# Altium PCB 400236.PcbDoc (part 1 of 7)
Units mm, origin at the board's own origin, x right, y up, seen from the top; angles counter-clockwise.
Board outline 136.53 x 63.5 mm, 4 copper layers (Top Layer, Mid-Layer 1, Mid-Layer 2, Bottom Layer), stack 1.49 mm thick; 344 components, 236 nets, 1364 pads, 1393 vias.
Unrouted connection lines stored in the file: 6.
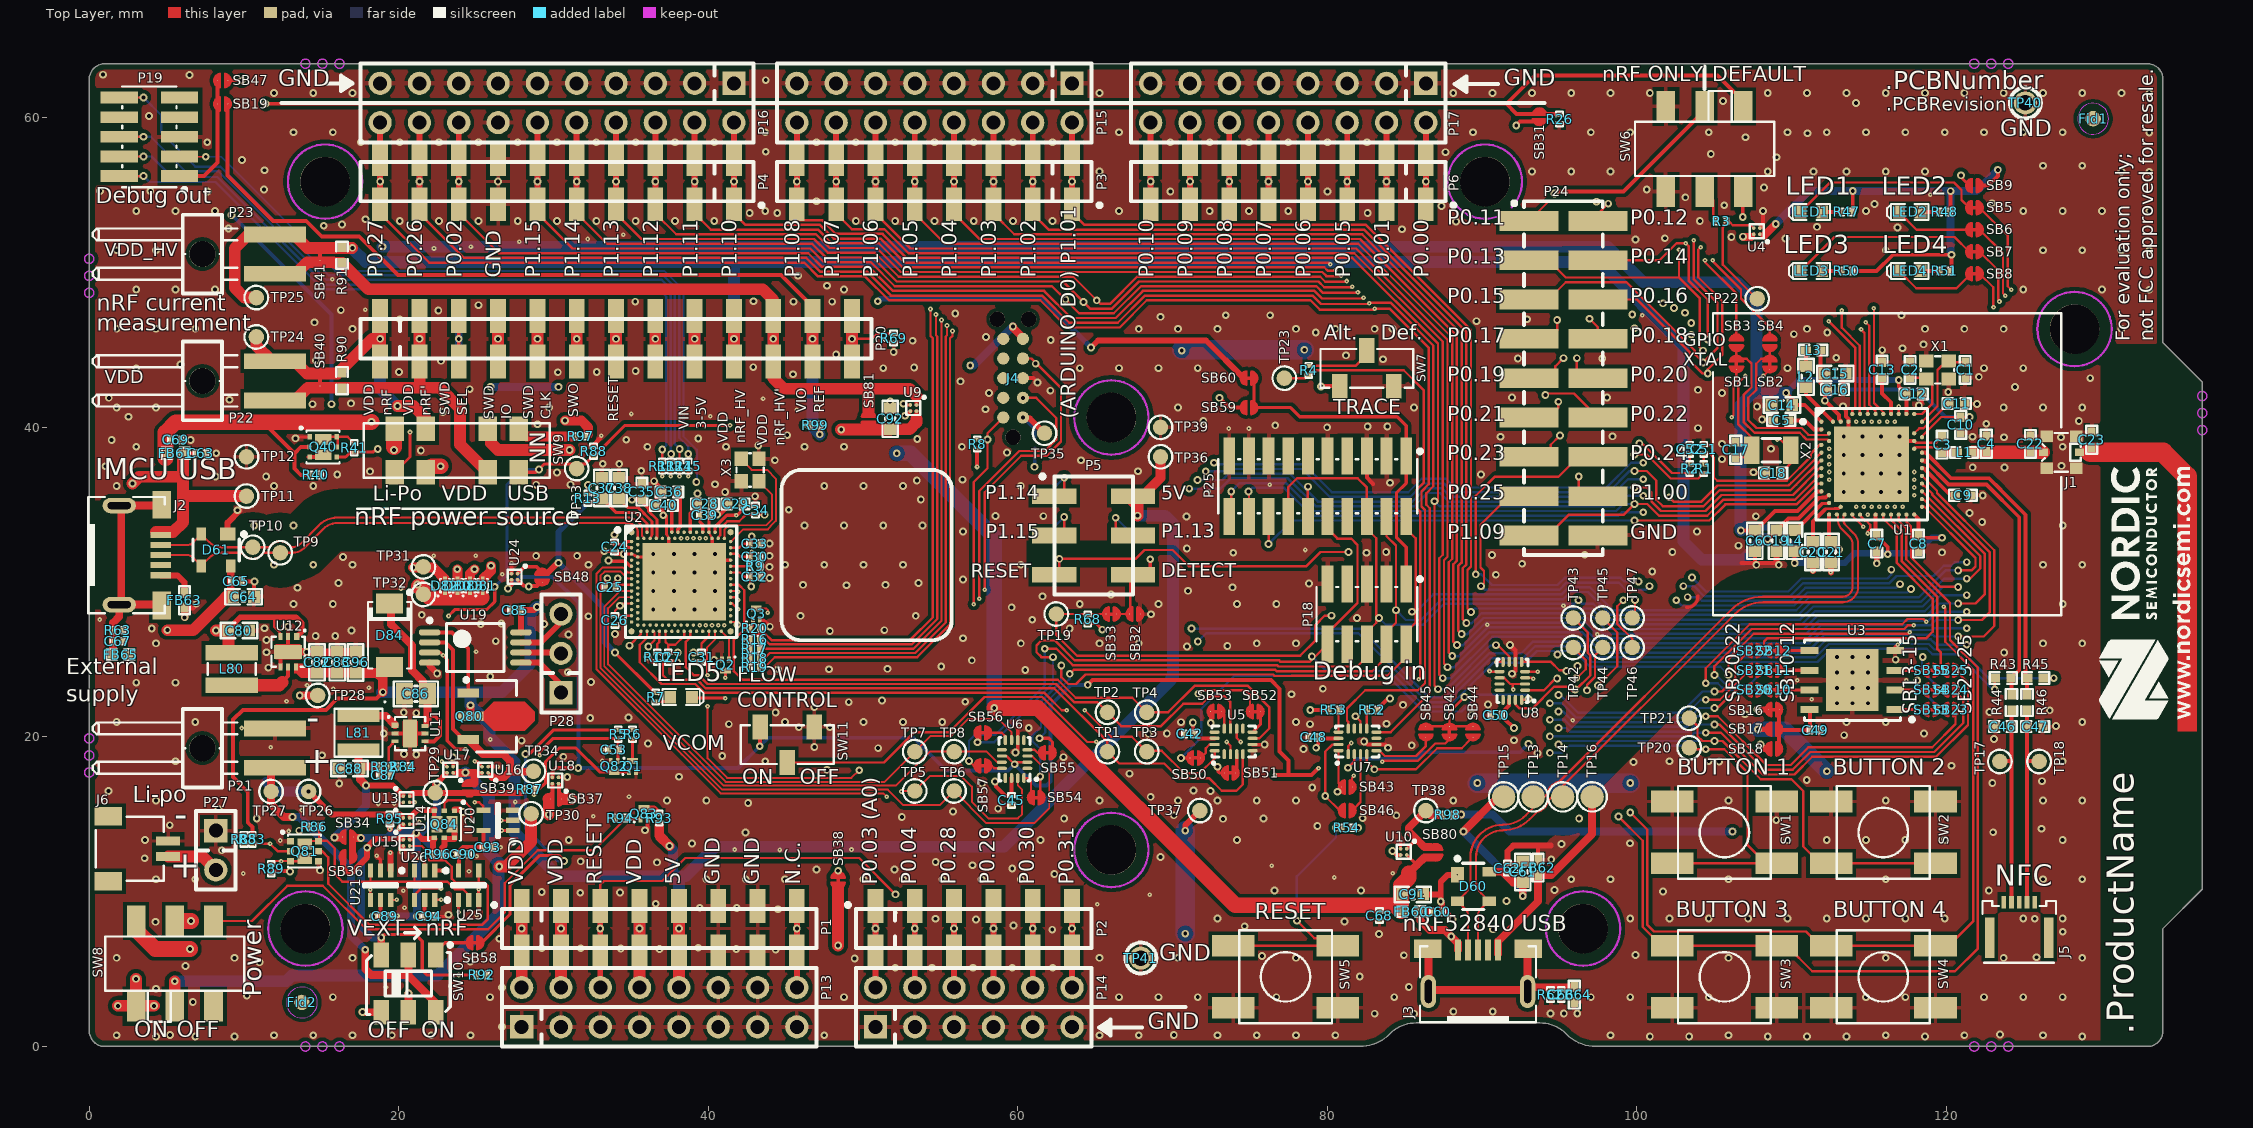
[diagram p0: Top Layer view]
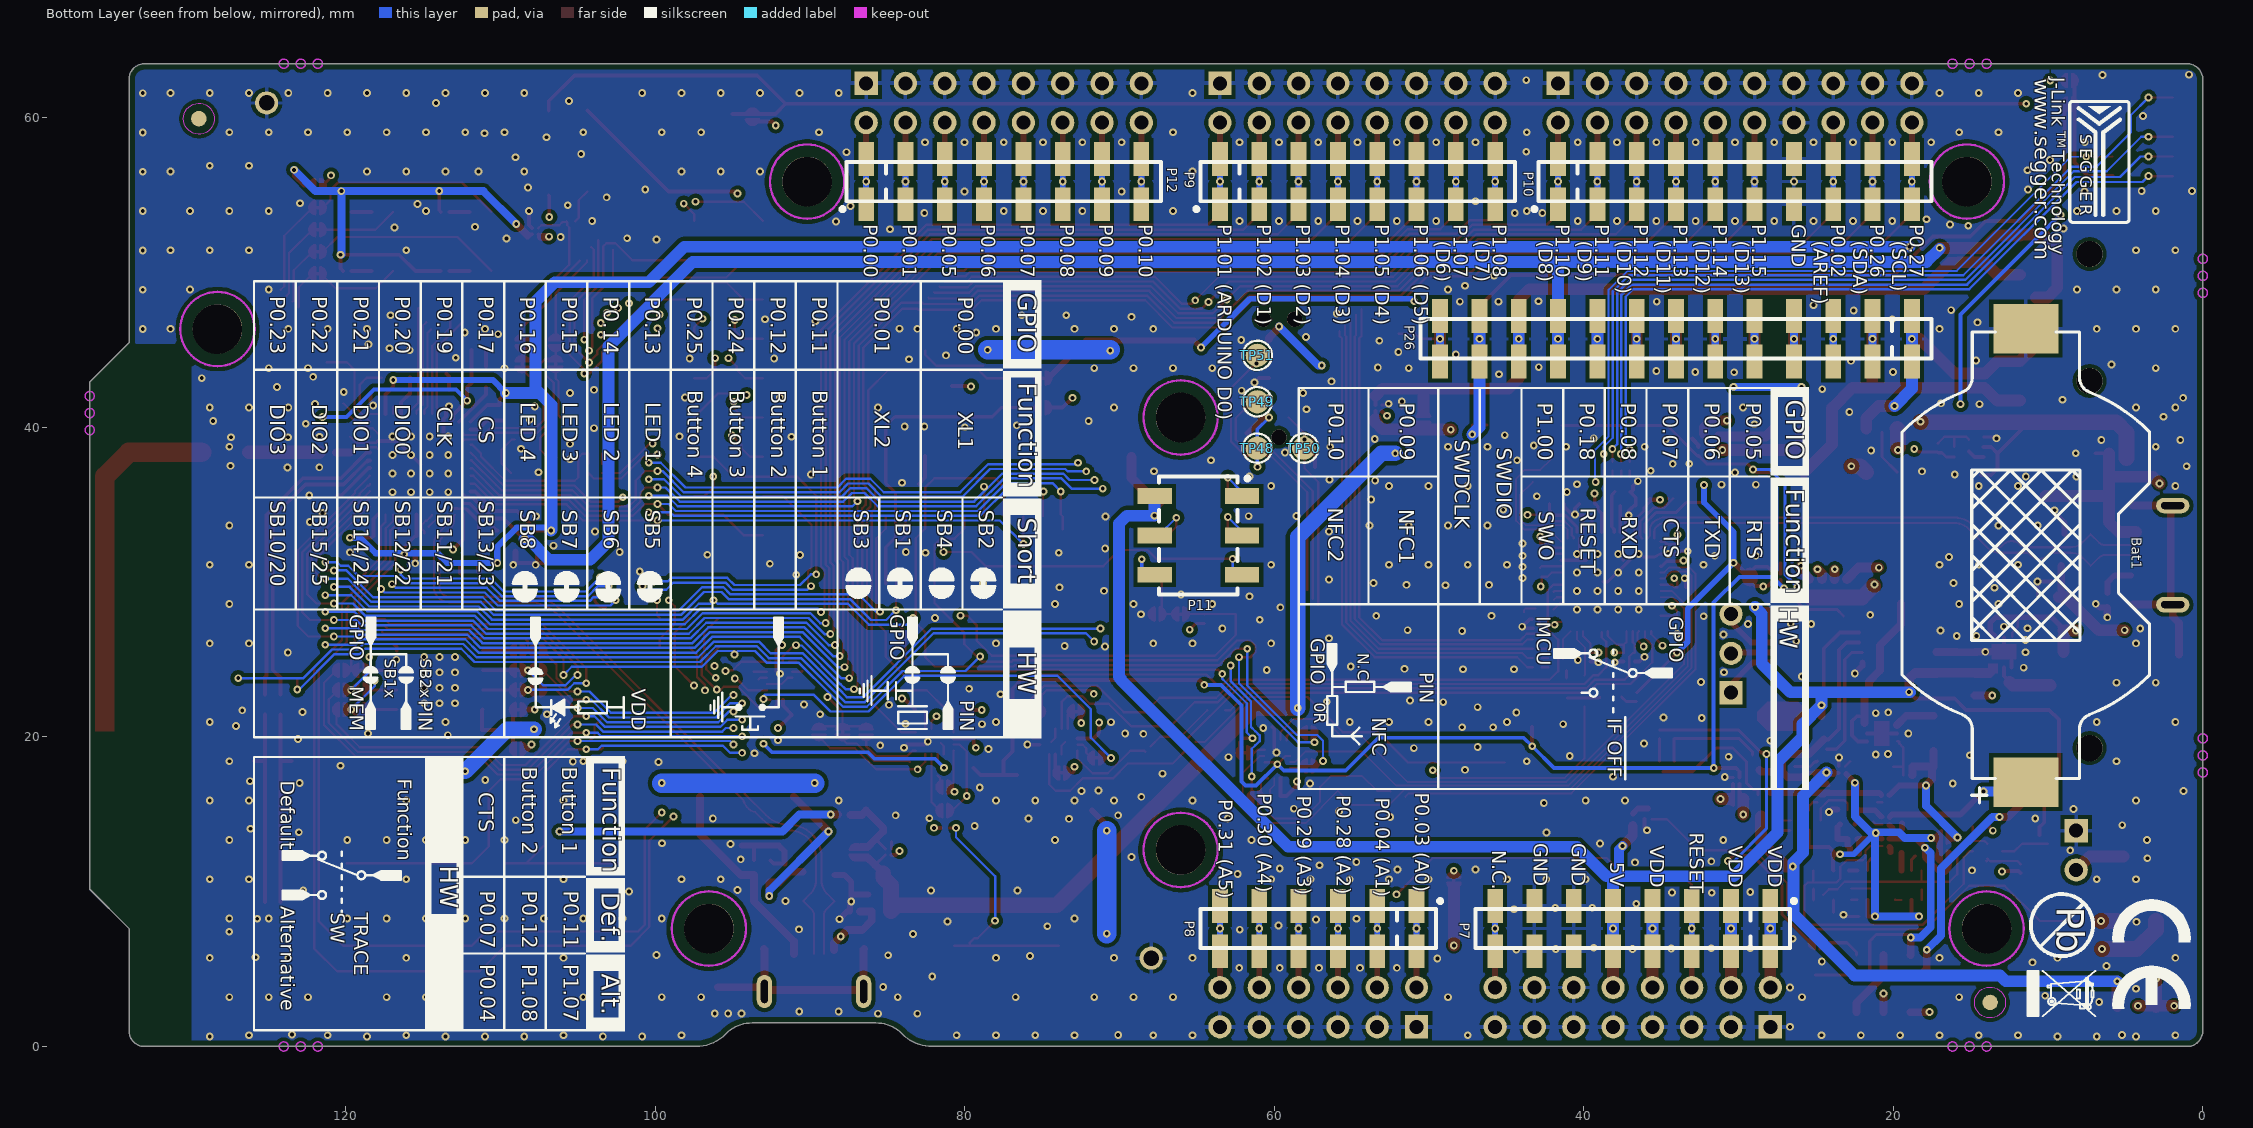
[diagram p1: Bottom Layer view, seen from below]
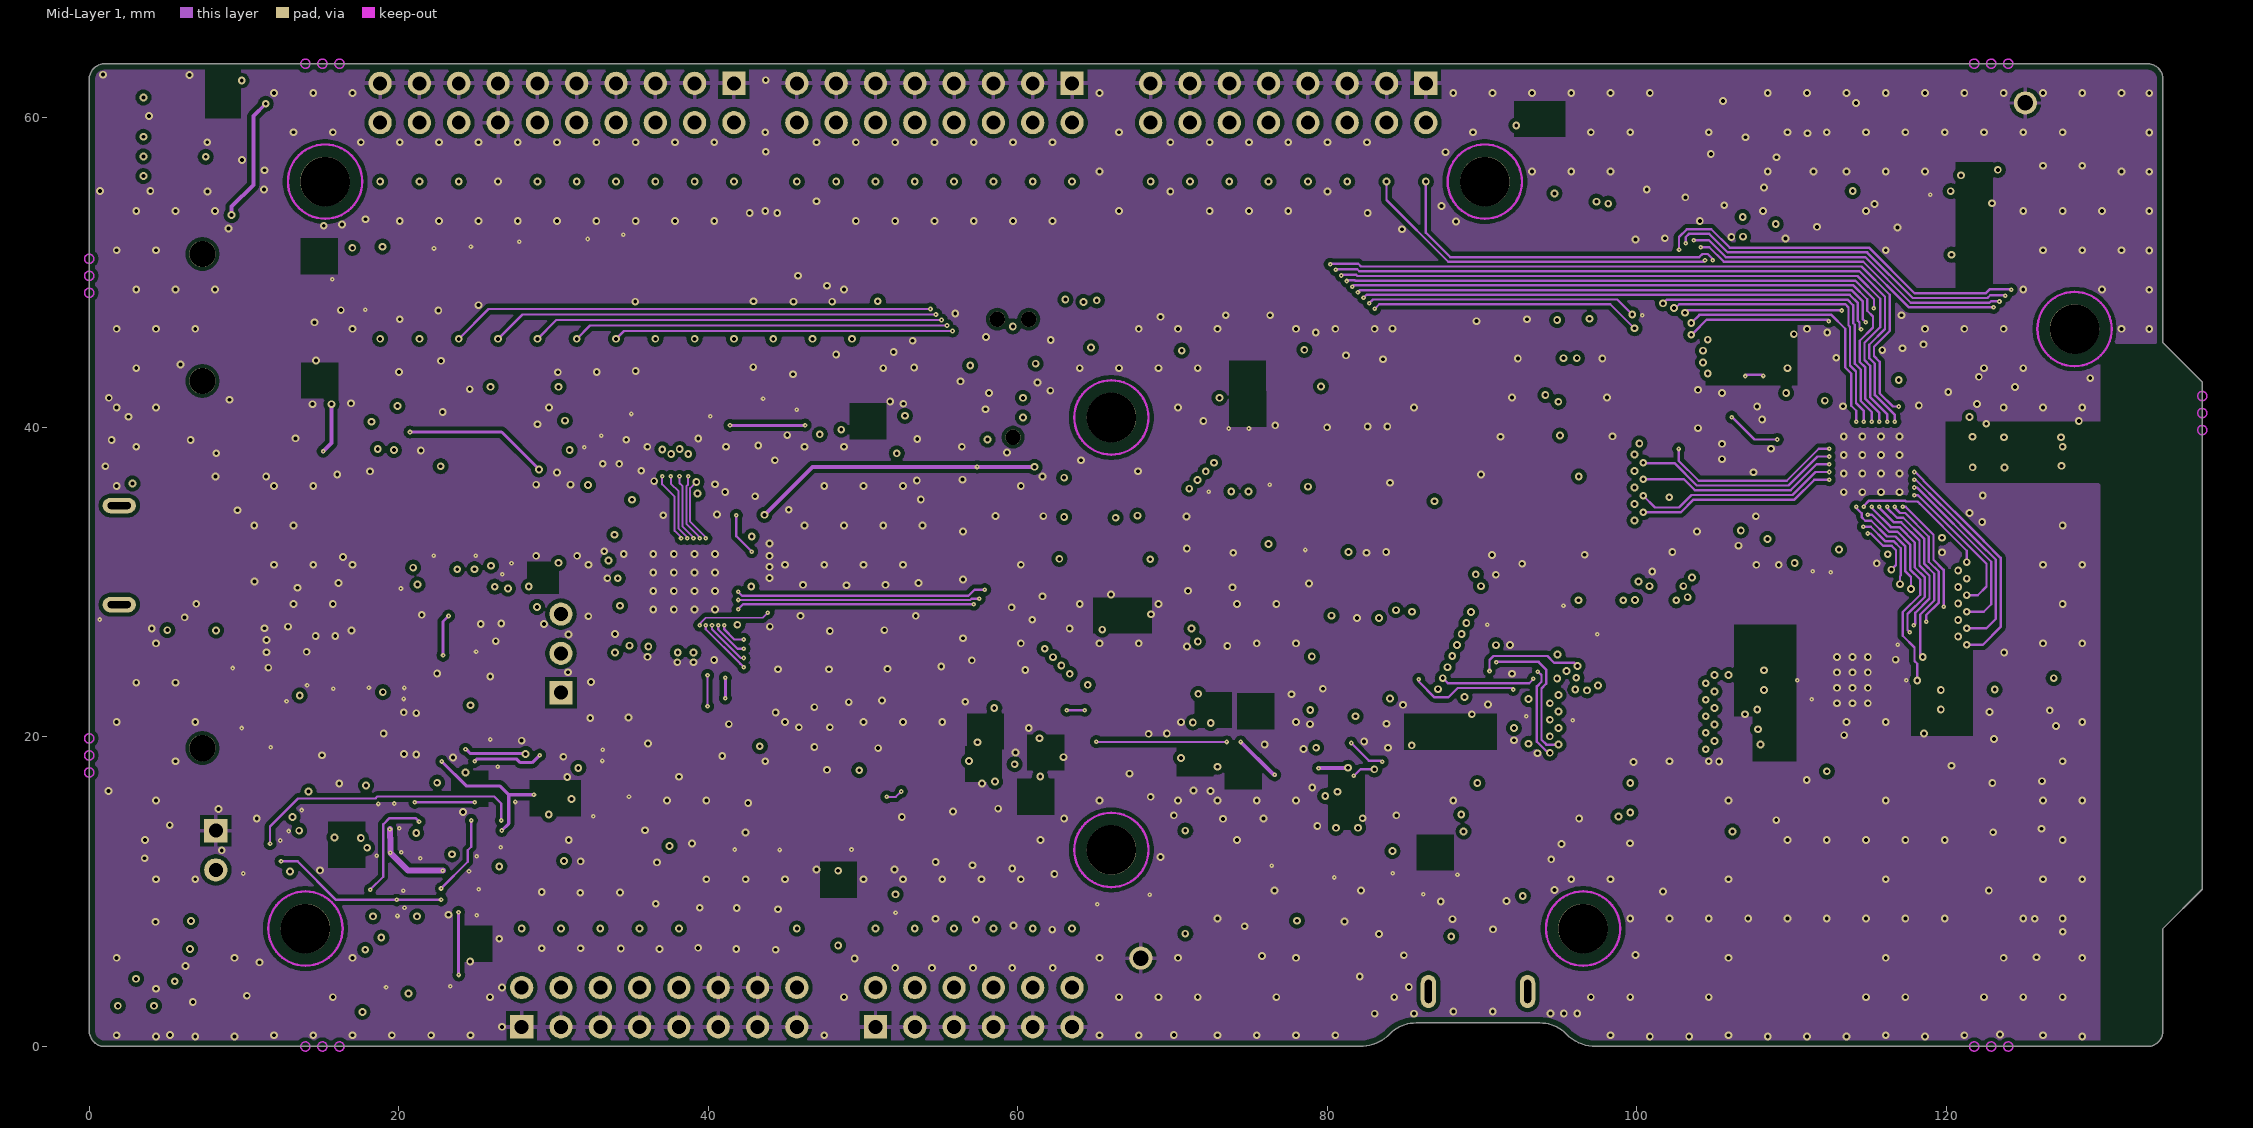
[diagram p2: Mid-Layer 1]
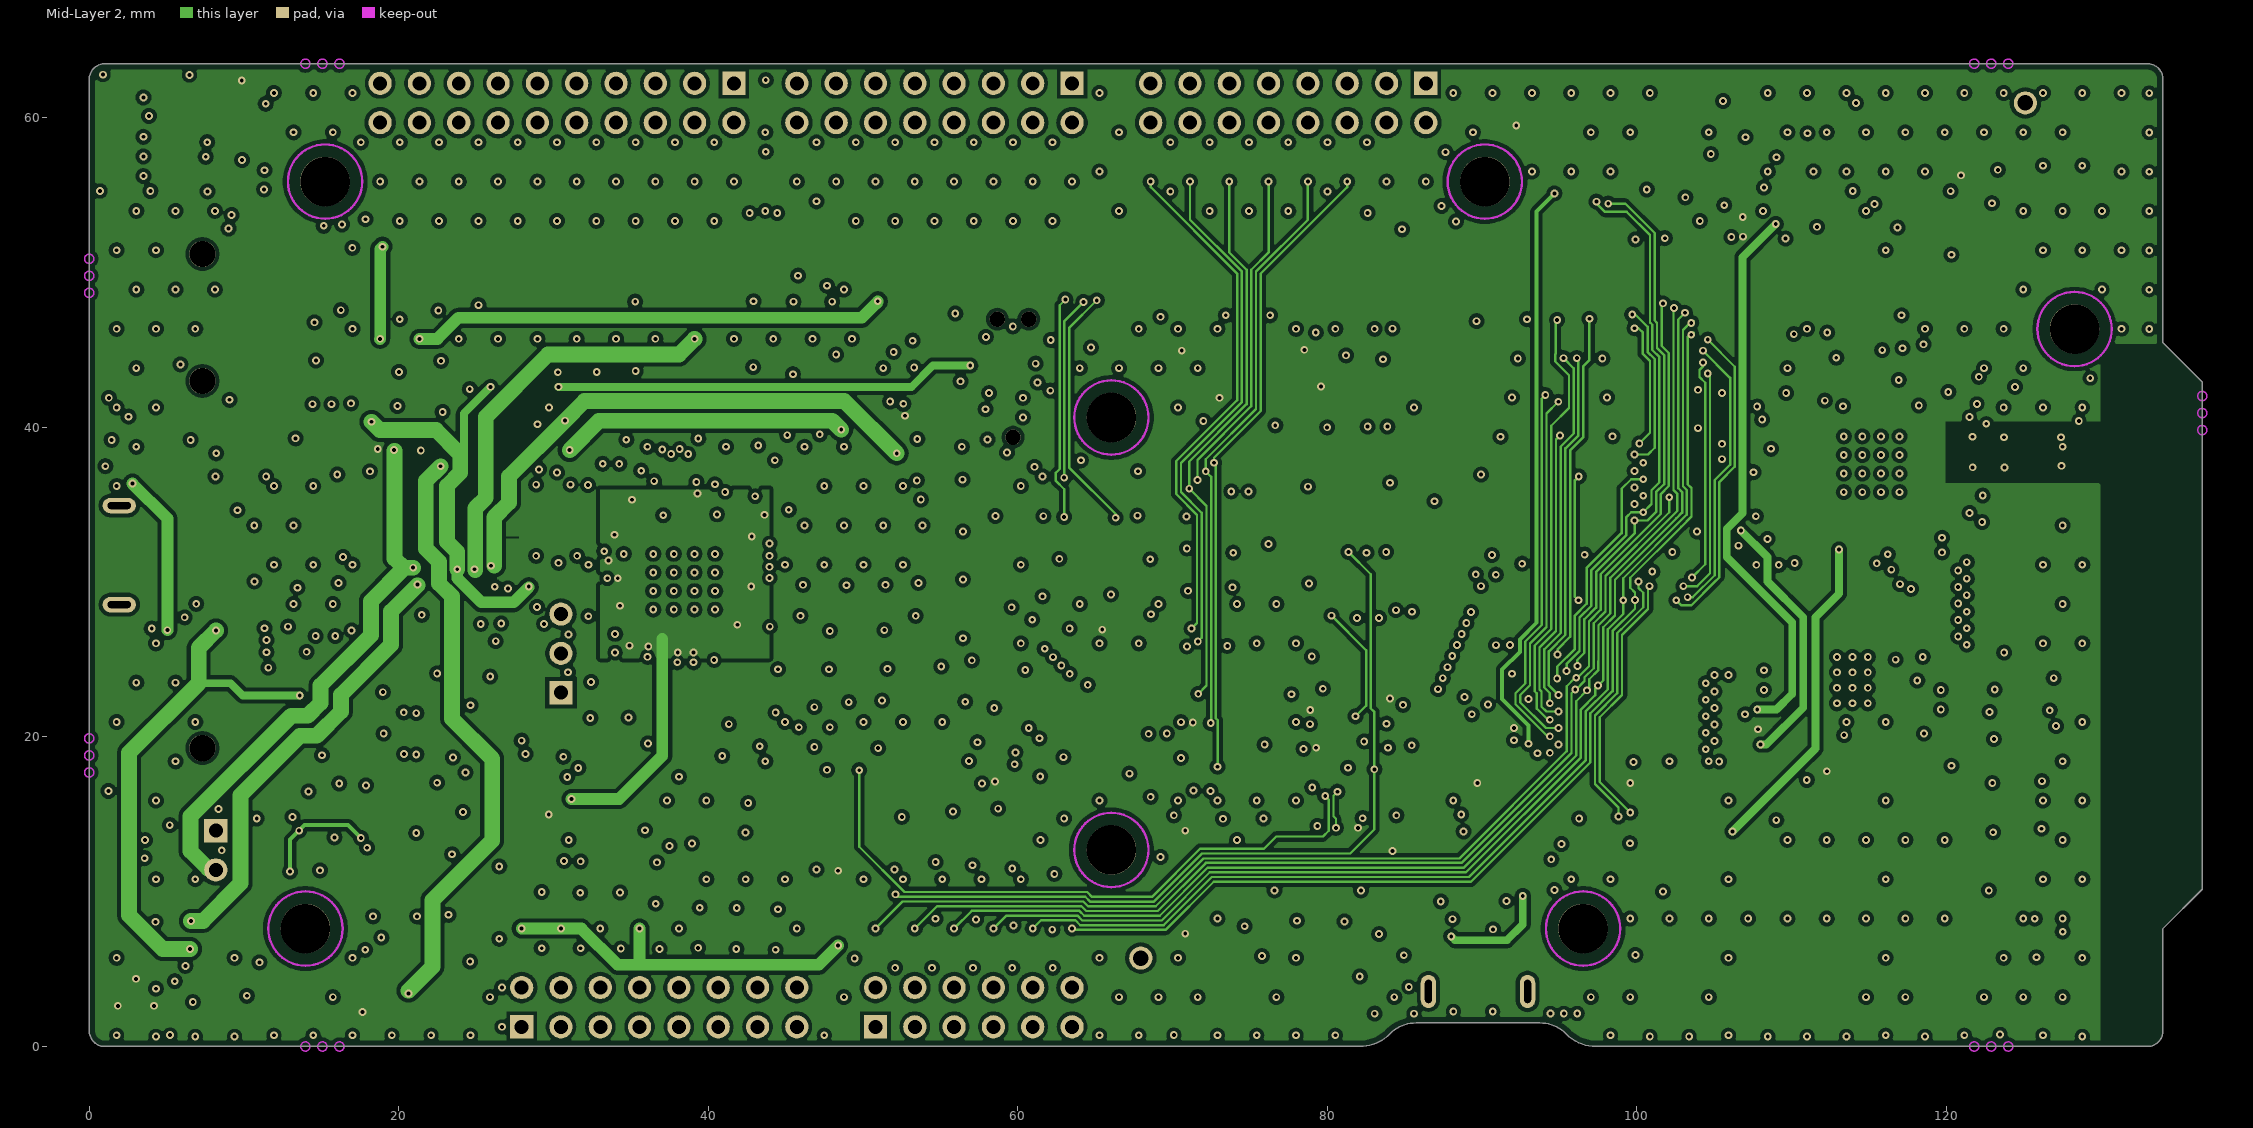
[diagram p3: Mid-Layer 2]
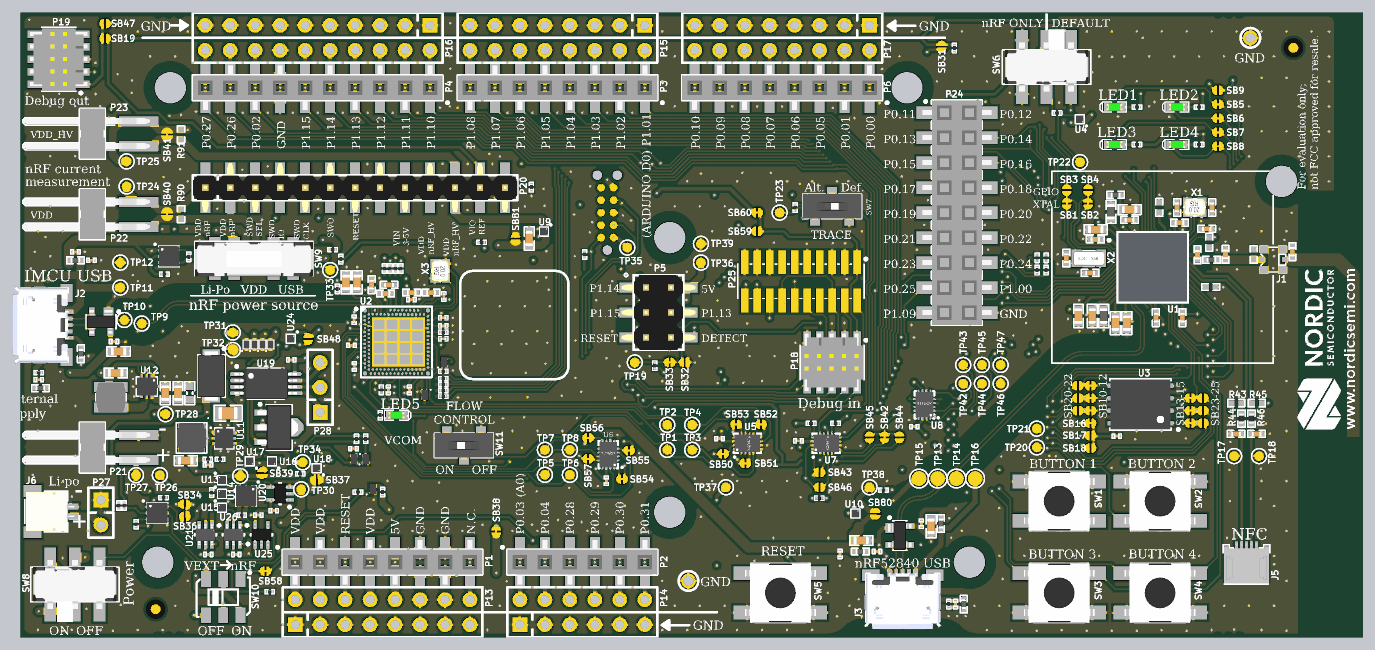
[diagram p8: 3D render of the assembled board from above, using the file's embedded part models]

## Layer stack, top to bottom
Top Solder: solder mask 0.025, Solder Resist, Dk 3.5
Top Layer: signal copper 0.035
Dielectric1: prepreg 0.075, FR-4, Dk 3.72
Mid-Layer 1: signal copper 0.035
Dielectric2: core 1.2, FR-4, Dk 3.72
Mid-Layer 2: signal copper 0.035
Dielectric3: prepreg 0.075, FR-4, Dk 3.72
Bottom Layer: signal copper 0.035
Bottom Solder: solder mask 0.025, Solder Resist, Dk 3.5

## Board outline
1.016,0 82.099,0 ccw(c82.099,2.717) 84.02,0.796 84.187,0.962 cw(c85.729,-0.876) 85.729,1.524 93.729,1.524 cw(c93.729,-0.876) 95.272,0.962 95.439,0.796 ccw(c97.36,2.717) 97.36,0 132.969,0 ccw(c132.969,1.016) 133.985,1.016 133.985,7.62 136.525,10.16 136.525,42.926 133.985,45.466 133.985,62.484 ccw(c132.969,62.484) 132.969,63.5 1.016,63.5 ccw(c1.016,62.484) 0,62.484 0,1.016 ccw(c1.016,1.016)

## Design rules (kind name [scope] priority, off if disabled: settings)
BoardOutlineClearance [All] p1: gap=0.381 ignorepadtopadclearanceinfootprint=FALSE
Clearance Microvia_Clearance [AsMM(ViaDiameter) = 0.3 vs AsMM(ViaDiameter) = 0.3] p1: gap=0.1 ignorepadtopadclearanceinfootprint=FALSE
Clearance USB_Poly_Clearance [InNamedPolygon('Top_Layer-GND') vs InDifferentialPair('D') or InDifferentialPair('IMCU')] p2: gap=1.778 ignorepadtopadclearanceinfootprint=FALSE
Clearance "NPTH clearance" [Not PadIsPlated And HoleSize > 0] p3: gap=0.229 ignorepadtopadclearanceinfootprint=FALSE except(0: Arc-Hole Track-Hole SMDPad-Hole THPad-Hole Via-Hole Fill-Hole Poly-Hole Region-Hole Text-Hole)
Clearance USB_Clearance [(InDifferentialPairClass('All Differential Pairs'))] p4: gap=0.125 ignorepadtopadclearanceinfootprint=FALSE
Clearance ANT_Clerance [InNet('ANT') or InNet('RF')] p5: gap=0.199 ignorepadtopadclearanceinfootprint=FALSE
Clearance Polygon_Clearance [(InNamedPolygon('Top_Layer-GND')) or (InNamedPolygon('Mid_Layer_1-GND')) or (InNamedPolygon('Mid_Layer_2-VDD')) or (InNamedPolygon('Mid_Layer_2-VDD_IMCU')) or (InNamedPolygon('Bottom_Layer-GND'))] p6: gap=0.254 ignorepadtopadclearanceinfootprint=FALSE except(0: Arc-Hole Track-Hole SMDPad-Hole THPad-Hole Via-Hole Fill-Hole Poly-Hole Region-Hole Text-Hole)
Clearance SB_Clearance [HasFootprint('Solderbridge') or HasFootprint('QFN40P180X140X55-10N')] p7: gap=0.127 ignorepadtopadclearanceinfootprint=FALSE except(0: Arc-Hole Track-Hole SMDPad-Hole THPad-Hole Via-Hole Fill-Hole Poly-Hole Region-Hole Text-Hole)
Clearance CSP_Clearance [HasFootprint('BGA4C40P2X2_76X76X62')] p8: gap=0.127 ignorepadtopadclearanceinfootprint=FALSE except(0: Arc-Hole Track-Hole SMDPad-Hole THPad-Hole Via-Hole Fill-Hole Poly-Hole Region-Hole Text-Hole)
Clearance P23_Clearance [HasFootprint('FPC_05P-0.5mm-RA-SMD')] p9: gap=0.127 ignorepadtopadclearanceinfootprint=FALSE except(0: Arc-Hole Track-Hole SMDPad-Hole THPad-Hole Via-Hole Fill-Hole Poly-Hole Region-Hole Text-Hole)
Clearance PSON35P100X50-8N_Clearance [HasFootprint('PSON35P100X50-8N')] p10: gap=0.15 ignorepadtopadclearanceinfootprint=FALSE except(0: Arc-Hole Track-Hole SMDPad-Hole THPad-Hole Via-Hole Fill-Hole Poly-Hole Region-Hole Text-Hole)
Clearance Top_layer_Clearance [All vs OnLayer('Top Layer')] p11: gap=0.125 ignorepadtopadclearanceinfootprint=FALSE
Clearance [All] p12: gap=0.125 ignorepadtopadclearanceinfootprint=FALSE
ComponentClearance [All] p1 off: gap=0.254 collisioncheckmode=3 verticalgap=0.254 showdistances=FALSE
DiffPairsRouting [All] p1: maxlimit=0.193 minlimit=0.191 mostfreqgap=0.193 toplayer_minwidth=0.15 toplayer_maxwidth=0.165 toplayer_prefwidth=0.165 midlayer1_minwidth=0.15 midlayer1_maxwidth=0.165 midlayer1_prefwidth=0.165 midlayer2_minwidth=0.15 midlayer2_maxwidth=0.165 midlayer2_prefwidth=0.165 bottomlayer_minwidth=0.15 bottomlayer_maxwidth=0.165 bottomlayer_prefwidth=0.165 maxuncoupledlength=12.7
FabricationTestPointUsage TestPointUsage [All] p1: valid=0 allowmultiple=FALSE
FabricationTestpoint Testpoint [All] p1: side=3 testpointundercomponent=TRUE minsize=1.016 maxsize=2.54 preferedsize=1.524 minholesize=0 maxholesize=1.016 preferedholesize=0.813 testpointgrid=0.025 allowsidetop=TRUE allowsidebottom=TRUE usegrid=TRUE gridtolerance=0
Height [All] p1 off: minheight=0 maxheight=25.4 prefheight=12.7
HoleSize [All] p1: absolutevalues=TRUE maxlimit=5 minlimit=0.1 maxpercent=80.000 minpercent=20.000
MinimumAnnularRing [All] p1 off: minimumring=0.152
NetAntennae NetAntennae_ANT [InNet('ANT')] p1: netantennaetolerance=40
NetAntennae [All] p2 off: netantennaetolerance=0
PolygonConnect PolygonConnect_1 [isVia and innet(gnd) or isVia and innet('VDD') or HasFootprint('COAXIAL-SWF') or isVia and innet('VDD_IMCU')] p1: connectstyle=Direct reliefconductorwidth=0.254 reliefentries=4 polygonreliefangle="90 Angle" airgapwidth=0.254
PolygonConnect [All] p2: connectstyle=Relief reliefconductorwidth=0.254 reliefentries=4 polygonreliefangle="90 Angle" airgapwidth=0.254
RoutingVias [All] p1: holewidth=0.25 width=0.5 viastyle="Through Hole" minholewidth=0.1 minwidth=0.3 maxholewidth=0.305 maxwidth=0.61
SilkToSolderMaskClearance SilkscreenOverComponentPads [IsPad] p1: minsilkscreentomaskgap=0.254 clearancetoexposedcopper=TRUE
SolderMaskExpansion SolderMaskExpansion_1 [isVia] p1: expansion=0.102 istentingtop=TRUE
SolderMaskExpansion [All] p2: expansion=0.076 istentingtop=FALSE
UnpouredPolygon [All] p1 off:
Width Width_Diff [(InDifferentialPairClass('All Differential Pairs'))] p1: maxlimit=0.165 minlimit=0.165 preferedwidth=0.165
Width [All] p2: maxlimit=10.16 minlimit=0.102 preferedwidth=0.152 minimp=50.000000 maximp=50.000000 favimp=50.000000
21 further rules are at their usual default settings.

## Classes and differential pairs
component class pca10056_sheet6_power_supply: Bat1 C53 C80 C82 C83 C85 C86 C87 C88 C89 C90 C91 C92 C93 C94 C96 D80 D81 D82 D83 D84 L80 L81 P21 P22 P23 Q1 Q80 Q81 Q82 Q83 Q84 R5 R6 R82 R83 R84 R85 R86 R87 R88 R89 R90 R91 R92 R93 R94 R95 R96 R97 R98 R99 SB34 SB36 SB37 SB38 SB39 SB40 SB41 SB48 SB58 SB80 SB81 SW8 SW9 SW10 TP24 TP25 TP26 TP27 TP28 TP29 TP30 TP32 TP33 TP34 TP35 TP36 TP37 TP38 TP39 TP40 TP41 U9 U10 U11 U12 U13 U14 U15 U16 U17 U18 U19 U20 U21 U24 U25 U26
component class pca10056_sheet5_connectors: C60 C61 C62 C63 C64 C65 C66 C67 C68 C69 D60 D61 FB60 FB61 FB62 FB63 FB64 FB65 J2 J3 J5 J6 P1 P2 P3 P4 P5 P6 P7 P8 P9 P10 P11 P12 P13 P14 P15 P16 P17 P18 P19 P20 P24 P25 P26 P27 R62 R63 R68 R69 SB19 SB32 SB33 SB47 SB59 SB60 TP9 TP10 TP11 TP12 TP13 TP14 TP15 TP16 TP17 TP18 TP19 TP31 TP42 TP43 TP44 TP45 TP46 TP47
component class pca10056_sheet4_misc: C42 C45 C46 C47 C48 C49 C50 LED1 LED2 LED3 LED4 P28 Q40 R3 R4 R26 R40 R41 R44 R46 R47 R48 R50 R51 R52 R53 R54 SB5 SB6 SB7 SB8 SB9 SB16 SB17 SB18 SB31 SB42 SB43 SB44 SB45 SB46 SB50 SB51 SB52 SB53 SB54 SB55 SB56 SB57 SW1 SW2 SW3 SW4 SW5 SW6 SW7 SW11 TP1 TP2 TP3 TP4 TP5 TP6 TP7 TP8 TP20 TP21 TP22 TP23 U3 U4 U5 U6 U7 U8
component class pca10056_sheet3_interface_mcu: C24 C25 C26 C27 C28 C29 C30 C31 C32 C33 C34 C35 C36 C37 C38 C39 C40 J4 LED5 Q2 Q3 R7 R8 R9 R10 R11 R12 R13 R14 R15 R16 R17 R18 R19 R20 TP48 TP49 TP50 TP51 U2 X3
differential pair IMCU: +IMCU_P -IMCU_N
differential pair D: +D_P -D_N

## Components (designator, comment, footprint, x,y, rotation, side; value= is the part's Value field where it differs from the comment)
Bat1 "Bat Holder CR2032" L-KLS5-CR2032-23-B1 11.43,31.735 r90 bottom locked
C1 "12pF" CAPC1005X04L 121.203,43.713 r270 top
C2 "12pF" CAPC1005X04L 117.647,43.713 r90 top
C3 "0.8pF" CAPC1005X04L 119.715,38.893 r270 top
C4 "0.5pF" CAPC1005X04L 122.57,38.938 r270 top
C5 "100nF" CAPC1005X04L 109.324,40.455 r180 top
C6 "4.7µF" CAPC1608X06L 107.613,32.667 r270 top
C7 "100nF" CAPC1005X04L 115.49,32.492 r270 top
C8 "100nF" CAPC1005X04L 118.189,32.492 r270 top
C9 "N.C." CAPC1005X04L_NC 121.064,35.617 r0 top
C10 "N.C." CAPC1005X04L_NC 120.919,40.157 r90 top
C11 "100pF" CAPC1005X04L 120.664,41.542 r0 top
C12 "100nF" CAPC1005X04L 117.889,42.167 r0 top
C13 "N.C." CAPC1005X04L_NC 115.839,43.717 r90 top
C14 "1.0µF" CAPC1608X06L 109.364,41.444 r180 top
C15 "1.0µF" CAPC1608X06L 112.814,43.481 r180 top
C16 "47nF" CAPC1005X04L 112.801,42.443 r0 top
C17 "12pF" CAPC1005X04L 106.385,38.55 r270 top
C18 "12pF" CAPC1005X04L 108.798,37.052 r0 top
C19 "4.7µF" CAPC1608X06L 109.014,32.667 r270 top
C20 "4.7µF" CAPC1608X06L 111.364,31.942 r270 top
C21 "4.7µF" CAPC1608X06L 112.539,31.942 r270 top
C22 "N.C." CAPC1005X04L_NC 125.423,38.935 r90 top
C23 "1.2pF" CAPC1005X04L 129.379,39.204 r90 top
C24 "100nF" CAPC0603X03L_C 33.939,32.277 r270 top
C25 "100nF" CAPC0603X03L_C 33.664,29.677 r180 top
C26 "100nF" CAPC0603X03L_C 33.964,27.527 r270 top
C27 "100nF" CAPC0603X03L_C 37.415,25.152 r270 top
C28 "1.0µF" CAPC1005X04L 39.789,35.052 r0 top
C29 "1.0µF" CAPC1005X04L 41.764,35.052 r0 top
C30 "2.2nF" CAPC0603X03L_C 43,31.652 r0 top
C31 "100nF" CAPC0603X03L_C 39.564,25.152 r270 top
C32 "100nF" CAPC0603X03L_C 43,30.352 r0 top
C33 "100nF" CAPC0603X03L_C 43,32.491 r0 top
C34 "100nF" CAPC0603X03L_C 43.05,34.65 r90 top
C35 "1.0µF" CAPC1005X04L 35.714,35.852 r270 top
C36 "1.0µF" CAPC1005X04L 37.489,35.832 r0 top
C37 "4.7µF" CAPC1608X06L 33.114,36.082 r90 top
C38 "4.7µF" CAPC1608X06L 34.239,36.082 r90 top
C39 "100nF" CAPC0603X03L_C 39.758,34.327 r0 top
C40 "1.0µF" CAPC1005X04L 37.139,34.957 r0 top
C42 "100nF" CAPC0603X03L_C 71.095,20.193 r0 top
C45 "100nF" CAPC0603X03L_C 59.588,15.9 r90 top
C46 "300pF" CAPC1005X04L 123.647,20.669 r180 top
C47 "300pF" CAPC1005X04L 125.73,20.669 r180 top
C48 "100nF" CAPC0603X03L_C 79.121,19.964 r0 top
C49 "100nF" CAPC0603X03L_C 111.506,20.447 r180 top
C50 "100nF" CAPC0603X03L_C 90.907,21.412 r0 top
C51 "N.C." CAPC0603X03L_C_NC 104.318,38.583 r270 top
C52 "N.C." CAPC0603X03L_C_NC 103.403,38.583 r270 top
C53 "10nF" CAPC0603X03L_C 33.875,19.175 r0 top
C60 "10nF" CAPC0603X03L_C 87.122,8.712 r180 top
C61 "10µF" CAPC1608X06L 92.623,11.278 r270 top
C62 "100nF" CAPC0603X03L_C 91.632,11.532 r270 top
C63 "10nF" CAPC0603X03L_C 7.219,38.329 r0 top
C64 "10µF" CAPC1608X06L 9.972,29.058 r180 top
C65 "100nF" CAPC0603X03L_C 9.515,30.074 r180 top
C66 "4.7nF" CAPC0603X03L_C 95.104,3.355 r90 top
C67 "4.7nF" CAPC0603X03L_C 1.85,26.187 r180 top
C68 "100nF" CAPC0603X03L_C 83.363,8.458 r90 top
C69 "100nF" CAPC0603X03L_C 5.588,39.192 r180 top
C80 "10µF" CAPC1608X06L 9.675,26.875 r180 top
C82 "10µF" CAPC1608X06L 14.725,24.825 r270 top
C83 "10µF" CAPC1608X06L 16.025,24.825 r270 top
C85 "100nF" CAPC0603X03L_C 27.534,28.194 r0 top
C86 "4.7µF" CAPC2012X11L 21.107,22.784 r0 top
C87 "150pF" CAPC0603X03L_C 19.075,17.526 r180 top
C88 "10µF" CAPC1608X06L 16.815,17.958 r0 top
C89 "100nF" CAPC0603X03L_C 19.101,8.407 r180 top
C90 "100nF" CAPC0603X03L_C 24.181,12.421 r180 top
C91 "1.0µF" CAPC1608X06L 85.522,9.83 r180 top
C92 "1.0µF" CAPC1608X06L 51.75,40.55 r270 top
C93 "100nF" CAPC0603X03L_C 25.756,12.878 r180 top
C94 "100nF" CAPC0603X03L_C 21.946,8.407 r180 top
C96 "N.C." CAPC1608X06L_NC 17.215,24.815 r270 top
D60 "PRTR5V0U2X" SOT190P230X110-4L 89.427,10.34 r0 top
D61 "PRTR5V0U2X" SOT190P230X110-4L 8.194,32.08 r270 top
D80 "NSR0620P2T5G" SODFL100X40-2N 23.8,29.766 r90 top
D81 "NSR0620P2T5G" SODFL100X40-2N 25.425,29.766 r90 top
D82 "NSR0620P2T5G" SODFL100X40-2N 22.987,29.766 r90 top
D83 "NSR0620P2T5G" SODFL100X40-2N 24.613,29.766 r90 top
D84 "LS14" SODFL500X108-2N 19.407,26.568 r270 top
FB60 "120R/0.55A" INDC1005X04L 85.42,8.712 r180 top
FB61 "120R/0.55A" INDC1005X04L 5.588,38.329 r180 top
FB62 "120R/0.55A" INDC1005X04L 93.614,11.558 r90 top
FB63 "120R/0.55A" INDC1005X04L 6.147,28.829 r270 top
FB64 "120R/0.55A" INDC1005X04L 95.942,3.355 r270 top
FB65 "120R/0.55A" INDC1005X04L 2.021,25.317 r0 top
Fid1 "Fiducial mark" Fiducial 129.471,59.944 r180 top value=N.A.
Fid2 "Fiducial mark" Fiducial 13.743,2.845 r0 top value=N.A.
J1 "MM8130-2600" COAXIAL-SWF 127.423,38.391 r90 top
J2 "MicroUSB-B" USB-Micro-B-RA-SMD-PiP_Allen 4.619,31.75 r0 top
J3 "MicroUSB-B" USB-Micro-B-RA-SMD-PiP_Allen 89.729,6.232 r90 top
J4 "TC2050-IDC" TC2050-IDC-NLFP 59.69,43.18 r90 top locked
J5 "FPC 0.5mm RA SMD" FPC_05P-0.5mm-RA-SMD 123.698,9.328 r0 top
J6 "HDR-2, 1mm" SM02B-SRSS-TB 5.105,12.776 r270 top
L1 "4.7nH" INDC1005X04L 121.138,38.385 r0 top
L2 "10µH" INDC1608X06L 110.914,43.267 r270 top
L3 "15nH" INDC1005X04L 111.389,44.992 r180 top
L4 "10µH" INDC1608X06L 110.189,32.667 r90 top
L80 "4.7µH" VLS3012HBX 9.2,24.4 r270 top
L81 "4.7µH" TY-NR3015 17.399,20.269 r270 top
LED1 "L0603G" LED_0603_G 111.273,53.917 r0 top
LED2 "L0603G" LED_0603_G 117.623,53.917 r0 top
LED3 "L0603G" LED_0603_G 111.273,50.107 r0 top
LED4 "L0603G" LED_0603_G 117.623,50.107 r0 top
LED5 "L0603G" LED_0603_G 38.239,22.575 r180 top
P1 "Socket 1x8" SOCKET_1x8_SMD 27.94,7.62 r0 top locked
P2 "Socket 1x6" SOCKET_1x6_SMD 50.8,7.62 r0 top locked
P3 "Socket 1x8" SOCKET_1x8_SMD 63.5,55.88 r180 top locked
P4 "Socket 1x10" SOCKET_1x10_SMD 41.656,55.88 r180 top locked
P5 "Pin Hdr 2x3" HDR_2x3-SMD 64.897,33.02 r270 top locked
P6 "Socket 1x8" SOCKET_1x8_SMD 86.36,55.88 r180 top locked
P7 "Pin List 1x8" LIST_1x8_SMD-NC 27.94,7.62 r0 bottom locked
P8 "Pin List 1x6" LIST_1x6_SMD-NC 50.8,7.62 r0 bottom locked
P9 "Pin List 1x8" LIST_1x8_SMD-NC 63.5,55.88 r180 bottom locked
P10 "Pin List 1x10" LIST_1x10_SMD-NC 41.656,55.88 r180 bottom locked
P11 "Socket 2x3" SOCKET_2x3_SMD-2.54mm-NC 64.897,33.02 r90 bottom
P12 "Pin List 1x8" LIST_1x8_SMD-NC 86.36,55.88 r180 bottom locked
P13 "Pin Header 2x8" HDR_2x8-NC 36.83,2.54 r0 top locked
P14 "Pin Header 2x6" HDR_2x6-NC 57.15,2.54 r0 top locked
P15 "Pin Header 2x8" HDR_2x8-NC 54.61,60.96 r180 top locked
P16 "Pin Header 2x10" HDR_2x10-NC 30.226,60.96 r180 top locked
P17 "Pin Header 2x8" HDR_2x8-NC 77.47,60.96 r180 top locked
P18 "Pin Header 2x5, 1.27mm" HDR_2x5-SMD-1.27mm-K 82.55,27.94 r180 top locked
P19 "Pin Header 2x5, 1.27mm" HDR_2x5-SMD-1.27mm-K 3.886,58.776 r90 top
P20 "Pin List 1x13" LIST_1x13_SMD 18.796,45.72 r0 top locked
P21 "Pin List 1x2, Angled" LIST_ANG_1x2-SMD-2.54MM 11.811,19.279 r270 top
P22 "Pin List 1x2, Angled" LIST_ANG_1x2-SMD-2.54MM 11.811,43 r270 top
P23 "Pin List 1x2, Angled" LIST_ANG_1x2-SMD-2.54MM 11.811,51.2 r270 top
P24 "Socket 2x9" SOCKET_2x9_SMD-2.54mm-Mirrored 95.25,43.18 r270 top locked
P25 "Pin Header 2x10, 1.27mm" HDR_2x10-SMD-1.27mm-NC 79.375,36.195 r180 top locked
P26 "Socket 1x13" LIST_1x13_SMD-NC 18.796,45.72 r0 bottom locked
P27 "Pin List 1x2" LIST_1x2-NC 8.179,12.675 r270 top locked
P28 "Pin List 1x3" LIST_1x3-NC 30.48,25.4 r90 top locked
Q1 "RV2C010UNT2L" DFN65P100X40-3L 35.1,18.1 r90 top
Q2 "RV2C010UNT2L" DFN65P100X40-3L 41.1,24.65 r270 top
Q3 "RV2C010UNT2L" DFN65P100X40-3L 43.1,27.95 r90 top
Q40 "PMCPB5530" PMCPB5530X 15.113,38.735 r0 top
Q80 "FCX690BTA" SOT89-150P409X160-3N 26.289,21.336 r0 top
Q81 "TSM250N02DCQ RFG" DFN65P200X200X80_HS-6N 13.919,12.624 r0 top
Q82 "RV2C010UNT2L" DFN65P100X40-3L 33.925,18.1 r270 top
Q83 "RV2C010UNT2L" DFN65P100X40-3L 35.839,15.037 r90 top
Q84 "PMCPB5530" PMCPB5530X 22.951,14.356 r270 top
R1 "0R" RESC0603X03L_C 104.318,37.338 r90 top
R2 "0R" RESC0603X03L_C 103.403,37.338 r90 top
R3 "10k" RESC0603X03L_C 105.435,53.315 r180 top
R4 "10k" RESC0603X03L_C 78.791,43.688 r90 top
R5 "10M" RESC0603X03L_C 34.175,20.175 r270 top
R6 "47k" RESC0603X03L_C 35.1,20.175 r90 top
R7 "560R" RESC0603X03L_C 36.6,22.575 r90 top
R8 "100k" RESC0603X03L_C 57.375,38.925 r270 top
R9 "49.9R" RESC0603X03L_C 43,31.017 r0 top
R10 "N.C." RESC0603X03L_C_NC 36.7,25.15 r270 top
R11 "150R" RESC0603X03L_C 37.021,37.494 r90 top
R12 "150R" RESC0603X03L_C 37.579,37.494 r90 top
R13 "2R2" RESC0603X03L_C 32.225,35.425 r270 top
R14 "150R" RESC0603X03L_C 38.138,37.494 r90 top
R15 "150R" RESC0603X03L_C 38.697,37.494 r90 top
R16 "150R" RESC0603X03L_C 43,26.3 r0 top
R17 "150R" RESC0603X03L_C 43,25.7 r0 top
R18 "150R" RESC0603X03L_C 43,25.1 r0 top
R19 "150R" RESC0603X03L_C 43,24.5 r0 top
R20 "1M0" RESC0603X03L_C 43,27.025 r0 top
R26 "47k" RESC0603X03L_C 94.996,59.919 r270 top
R40 "150k" RESC0603X03L_C 14.63,36.932 r0 top
R41 "1M0" RESC0603X03L_C 17.12,38.684 r90 top
R43 "N.C." RESC1005X04L_NC 123.669,23.8 r0 top
R44 "0R" RESC1005X04L 124.206,22.225 r90 top
R45 "N.C." RESC1005X04L_NC 125.751,23.8 r180 top
R46 "0R" RESC1005X04L 125.197,22.225 r90 top
R47 "220R" RESC0603X03L_C 113.559,53.917 r0 top
R48 "220R" RESC0603X03L_C 119.884,53.917 r0 top
R50 "220R" RESC0603X03L_C 113.559,50.107 r0 top
R51 "220R" RESC0603X03L_C 119.884,50.107 r0 top
R52 "4k7" RESC0603X03L_C 82.906,21.742 r180 top
R53 "4k7" RESC0603X03L_C 80.416,21.742 r0 top
R54 "N.C." RESC0603X03L_C_NC 81.25,14.125 r0 top
R62 "1M0" RESC0603X03L_C 94.418,3.355 r90 top
R63 "1M0" RESC0603X03L_C 1.85,26.899 r180 top
R68 "1M0" RESC0603X03L_C 64.516,27.61 r270 top
R69 "866R" RESC0603X03L_C 51.968,45.771 r90 top
R82 "330k" RESC0603X03L_C 19.05,18.085 r180 top
R83 "820k" RESC0603X03L_C 10.538,13.386 r270 top
R84 "120k" RESC0603X03L_C 20.295,18.085 r180 top
R85 "470k" RESC0603X03L_C 10.004,13.386 r90 top
R86 "1M0" RESC0603X03L_C 14.55,14.2 r0 top
R87 "1M0" RESC0603X03L_C 28.448,16.612 r0 top
R88 "10M" RESC0603X03L_C 32.588,38.456 r90 top
R89 "1M0" RESC0603X03L_C 11.76,11.481 r90 top
R90 "N.C." RESC1005X04L_NC 16.332,43.025 r90 top
R91 "N.C." RESC1005X04L_NC 16.332,51.13 r90 top
R92 "10M" RESC0603X03L_C 25.349,4.623 r0 top
R93 "1k" RESC0603X03L_C 36.83,14.757 r90 top
R94 "10M" RESC0603X03L_C 34.315,14.757 r180 top
R95 "100k" RESC0603X03L_C 19.431,14.707 r270 top
R96 "1M0" RESC0603X03L_C 22.504,12.421 r0 top
R97 "4R7" RESC0603X03L_C 31.75,39.421 r180 top
R98 "4R7" RESC0603X03L_C 87.782,14.961 r0 top
R99 "10k" RESC0603X03L_C 46.9,40.15 r0 top
SB1 "Solderbridge" Solderbridge_Shorted 106.426,44.094 r90 top net-tie
SB2 "Solderbridge" Solderbridge_Shorted 108.585,44.094 r90 top net-tie
SB3 "Solderbridge" Solderbridge 106.426,45.466 r90 top
SB4 "Solderbridge" Solderbridge 108.585,45.466 r90 top
SB5 "Solderbridge" Solderbridge_Shorted 121.801,54.197 r180 top net-tie
SB6 "Solderbridge" Solderbridge_Shorted 121.801,52.774 r180 top net-tie
SB7 "Solderbridge" Solderbridge_Shorted 121.801,51.352 r180 top net-tie
SB8 "Solderbridge" Solderbridge_Shorted 121.801,49.93 r180 top net-tie
SB9 "Solderbridge" Solderbridge 121.802,55.619 r0 top
SB10 "Solderbridge" Solderbridge_Shorted 108.839,23.038 r0 top net-tie
SB11 "Solderbridge" Solderbridge_Shorted 108.839,24.308 r0 top net-tie
SB12 "Solderbridge" Solderbridge_Shorted 108.839,25.578 r0 top net-tie
SB13 "Solderbridge" Solderbridge_Shorted 118.999,21.768 r180 top net-tie
SB14 "Solderbridge" Solderbridge_Shorted 118.999,23.038 r180 top net-tie
SB15 "Solderbridge" Solderbridge_Shorted 118.999,24.308 r180 top net-tie
SB16 "Solderbridge" Solderbridge_Shorted 108.839,21.768 r0 top net-tie
SB17 "Solderbridge" Solderbridge 108.839,20.498 r0 top
SB18 "Solderbridge" Solderbridge 108.839,19.228 r0 top
SB19 "Solderbridge" Solderbridge 8.611,60.9 r0 top
SB20 "Solderbridge" Solderbridge 107.569,23.038 r180 top
SB21 "Solderbridge" Solderbridge 107.569,24.308 r180 top
SB22 "Solderbridge" Solderbridge 107.569,25.578 r180 top
SB23 "Solderbridge" Solderbridge 120.269,21.768 r0 top
SB24 "Solderbridge" Solderbridge 120.269,23.038 r0 top
SB25 "Solderbridge" Solderbridge 120.269,24.308 r0 top
SB31 "Solderbridge" Solderbridge 93.701,60.071 r90 top
SB32 "Solderbridge" Solderbridge 67.564,27.94 r180 top
SB33 "Solderbridge" Solderbridge_Shorted 66.04,27.94 r180 top net-tie
SB34 "Solderbridge" Solderbridge 16.709,13.535 r180 top
SB36 "Solderbridge" Solderbridge 16.709,12.265 r180 top
SB37 "Solderbridge" Solderbridge 30.144,15.992 r180 top
SB38 "Solderbridge" Solderbridge_Shorted 48.387,10.744 r90 top net-tie
SB39 "Solderbridge" Solderbridge 24.562,16.688 r270 top
SB40 "Solderbridge" Solderbridge_Shorted 14.91,43.025 r270 top net-tie
SB41 "Solderbridge" Solderbridge_Shorted 14.91,51.13 r270 top net-tie
SB42 "Solderbridge" Solderbridge_Shorted 87.884,20.32 r90 top net-tie
SB43 "Solderbridge" Solderbridge 81.28,16.764 r0 top
SB44 "Solderbridge" Solderbridge 89.408,20.32 r90 top
SB45 "Solderbridge" Solderbridge 86.36,20.32 r90 top
SB46 "Solderbridge" Solderbridge 81.28,15.24 r180 top
SB47 "Solderbridge" Solderbridge 8.611,62.408 r180 top
SB48 "Solderbridge" Solderbridge 29.261,30.324 r270 top
SB50 "Solderbridge" Solderbridge_Shorted 71.476,18.644 r0 top net-tie
SB51 "Solderbridge" Solderbridge_Shorted 73.725,17.675 r0 top net-tie
SB52 "Solderbridge" Solderbridge_Shorted 75.336,21.641 r0 top net-tie
SB53 "Solderbridge" Solderbridge_Shorted 72.796,21.641 r0 top net-tie
SB54 "Solderbridge" Solderbridge_Shorted 61.189,16.078 r180 top net-tie
SB55 "Solderbridge" Solderbridge_Shorted 61.9,18.974 r180 top net-tie
SB56 "Solderbridge" Solderbridge_Shorted 57.734,20.269 r0 top net-tie
SB57 "Solderbridge" Solderbridge_Shorted 57.734,18.136 r0 top net-tie
SB58 "Solderbridge" Solderbridge_Shorted 24.917,6.706 r180 top net-tie
SB59 "Solderbridge" Solderbridge 74.93,41.275 r180 top
SB60 "Solderbridge" Solderbridge_Shorted 74.93,43.18 r180 top net-tie
SB80 "Solderbridge" Solderbridge 86.995,12.548 r270 top
SB81 "Solderbridge" Solderbridge 50.35,40.525 r270 top
SW1 "PB SW" Switch-PB-6.2x6.3mm-SMD 105.653,13.83 r0 top locked
SW2 "PB SW" Switch-PB-6.2x6.3mm-SMD 115.915,13.83 r0 top locked
SW3 "PB SW" Switch-PB-6.2x6.3mm-SMD 105.653,4.502 r180 top locked
SW4 "PB SW" Switch-PB-6.2x6.3mm-SMD 115.915,4.502 r180 top locked
SW5 "PB SW" Switch-PB-6.2x6.3mm-SMD 77.292,4.502 r180 top
SW6 "MKH-22D14-G2-B" MKH-22D14-G2-B 104.369,57.988 r180 top
SW7 "Switch" CJS-120xA 82.55,43.815 r0 top
SW8 "MKH-22D14-G2-B" MKH-22D14-G2-B 5.528,5.359 r0 top
SW9 "JS203011JCQN" Switch-Slide-J-Lead-DP3T-13x3.5mm 23.749,38.506 r0 top locked
SW10 "CAS-220TA" CAS-220TA 20.625,4.064 r180 top
SW11 "Switch" CJS-120xA 45.1,19.5 r180 top
TP1 "Ø1.0mm,SMD" TP_SMD_D1.0mm 65.786,19.05 r90 top
TP2 "Ø1.0mm,SMD" TP_SMD_D1.0mm 65.786,21.59 r90 top
TP3 "Ø1.0mm,SMD" TP_SMD_D1.0mm 68.326,19.05 r90 top
TP4 "Ø1.0mm,SMD" TP_SMD_D1.0mm 68.326,21.59 r90 top
TP5 "Ø1.0mm,SMD" TP_SMD_D1.0mm 53.34,16.51 r90 top
TP6 "Ø1.0mm,SMD" TP_SMD_D1.0mm 55.88,16.51 r90 top
TP7 "Ø1.0mm,SMD" TP_SMD_D1.0mm 53.34,19.05 r90 top
TP8 "Ø1.0mm,SMD" TP_SMD_D1.0mm 55.88,19.05 r90 top
TP9 "Ø1.0mm,SMD" TP_SMD_D1.0mm 12.344,31.901 r90 top
TP10 "Ø1.0mm,SMD" TP_SMD_D1.0mm 10.566,32.259 r90 top
TP11 "Ø1.0mm,SMD" TP_SMD_D1.0mm 10.16,35.56 r90 top locked
TP12 "Ø1.0mm,SMD" TP_SMD_D1.0mm 10.16,38.1 r90 top locked
TP13 "Ø1.5mm,SMD" TP_SMD_D1.5mm 93.294,16.129 r0 top
TP14 "Ø1.5mm,SMD" TP_SMD_D1.5mm 95.199,16.129 r0 top
TP15 "Ø1.5mm,SMD" TP_SMD_D1.5mm 91.389,16.129 r0 top
TP16 "Ø1.5mm,SMD" TP_SMD_D1.5mm 97.104,16.129 r0 top
TP17 "Ø1.0mm,SMD" TP_SMD_D1.0mm 123.444,18.415 r90 top
TP18 "Ø1.0mm,SMD" TP_SMD_D1.0mm 125.984,18.415 r90 top
TP19 "Ø1.0mm,SMD" TP_SMD_D1.0mm 62.484,27.94 r90 top
TP20 "Ø1.0mm,SMD" TP_SMD_D1.0mm 103.378,19.304 r0 top
TP21 "Ø1.0mm,SMD" TP_SMD_D1.0mm 103.378,21.209 r0 top
TP22 "Ø1.0mm,SMD" TP_SMD_D1.0mm 107.772,48.311 r0 top
TP23 "Ø1.0mm,SMD" TP_SMD_D1.0mm 77.216,43.18 r0 top
TP24 "Ø1.0mm,SMD" TP_SMD_D1.0mm 10.795,45.847 r0 top
TP25 "Ø1.0mm,SMD" TP_SMD_D1.0mm 10.795,48.387 r0 top
TP26 "Ø1.0mm,SMD" TP_SMD_D1.0mm 14.175,16.475 r0 top
TP27 "Ø1.0mm,SMD" TP_SMD_D1.0mm 11.75,16.475 r0 top
TP28 "Ø1.0mm,SMD" TP_SMD_D1.0mm 14.757,22.682 r0 top
TP29 "Ø1.0mm,SMD" TP_SMD_D1.0mm 22.352,16.383 r0 top
TP30 "Ø1.0mm,SMD" TP_SMD_D1.0mm 28.55,15.037 r270 top
TP31 "Ø1.0mm,SMD" TP_SMD_D1.0mm 21.59,30.988 r90 top
TP32 "Ø1.0mm,SMD" TP_SMD_D1.0mm 21.59,29.21 r0 top
TP33 "Ø1.0mm,SMD" TP_SMD_D1.0mm 31.496,37.338 r0 top
TP34 "Ø1.0mm,SMD" TP_SMD_D1.0mm 28.702,17.78 r0 top
TP35 "Ø1.0mm,SMD" TP_SMD_D1.0mm 61.722,39.624 r0 top
TP36 "Ø1.0mm,SMD" TP_SMD_D1.0mm 69.215,38.1 r0 top
TP37 "Ø1.0mm,SMD" TP_SMD_D1.0mm 71.755,15.24 r0 top
TP38 "Ø1.0mm,SMD" TP_SMD_D1.0mm 86.36,15.24 r0 top
TP39 "Ø1.0mm,SMD" TP_SMD_D1.0mm 69.215,40.005 r0 top
TP40 "TP" TESTPAD-TH 125.095,60.96 r0 top
TP41 "TP" TESTPAD-TH 67.945,5.715 r0 top
TP42 "Ø1.0mm,SMD" TP_SMD_D1.0mm 95.885,25.781 r0 top
TP43 "Ø1.0mm,SMD" TP_SMD_D1.0mm 95.885,27.686 r0 top
TP44 "Ø1.0mm,SMD" TP_SMD_D1.0mm 97.79,25.781 r0 top
TP45 "Ø1.0mm,SMD" TP_SMD_D1.0mm 97.79,27.686 r0 top
TP46 "Ø1.0mm,SMD" TP_SMD_D1.0mm 99.695,25.781 r0 top
TP47 "Ø1.0mm,SMD" TP_SMD_D1.0mm 99.695,27.686 r0 top
TP48 "Ø1.5mm,SMD" TP_SMD_D1.5mm 61.087,38.656 r180 bottom
TP49 "Ø1.5mm,SMD" TP_SMD_D1.5mm 61.087,41.656 r180 bottom
TP50 "Ø1.5mm,SMD" TP_SMD_D1.5mm 58.087,38.656 r180 bottom
TP51 "Ø1.5mm,SMD" TP_SMD_D1.5mm 61.087,44.656 r180 bottom
U1 "nRF52840-QIAA" AQFN50P700X700X85_HS-74N 115.164,37.617 r0 top locked
U2 "nRF5340-QKAA" AQFN40P700X700X85_HS-99N 38.239,30.027 r0 top
U3 "MX25R6435F" SON127P600X80_HS-9N 113.919,23.673 r180 top locked
U4 "TCK106AG" BGA4C40P2X2_76X76X62 107.744,52.676 r180 top
U5 "FSA2466UMX" XQFN40P180X260X50-16N 73.939,19.71 r90 top
U6 "FSA2466UMX" XQFN40P180X260X50-16N 59.792,18.567 r180 top
U7 "FSA2466UMX" XQFN40P180X260X50-16N 81.94,19.71 r90 top locked
U8 "FSA2466UMX" XQFN40P180X260X50-16N 91.948,23.622 r180 top locked
U9 "TCK106AG" BGA4C40P2X2_76X76X62 53.25,41.25 r270 top
U10 "TCK106AG" BGA4C40P2X2_76X76X62 84.925,12.575 r270 top
U11 "XC9236" USP-6C 20.726,20.218 r0 top
U12 "XC9148" USP-6C 12.85,25.5 r270 top
U13 "TCK106AG" BGA4C40P2X2_76X76X62 20.498,15.977 r0 top
U14 "TCK106AG" BGA4C40P2X2_76X76X62 20.498,14.567 r0 top
U15 "TCK106AG" BGA4C40P2X2_76X76X62 20.498,13.157 r0 top
U16 "TCK106AG" BGA4C40P2X2_76X76X62 25.578,17.882 r180 top
U17 "TCK106AG" BGA4C40P2X2_76X76X62 23.317,17.882 r180 top
U18 "TCK106AG" BGA4C40P2X2_76X76X62 30.119,17.186 r180 top
U19 "TS27L2IPT" TSOP65P640X120-8N 24.943,25.781 r0 top
U20 "74LVC1G08" SOT65P210X100-5N 26.416,14.605 r180 top
U21 "74LVC1G11" SOT65P210X100-6N 18.821,10.414 r270 top
U24 "TCK106AG" BGA4C40P2X2_76X76X62 27.483,30.353 r270 top
U25 "74LVC1G08" SOT65P210X100-5N 24.511,10.414 r90 top
U26 "74LVC1G11" SOT65P210X100-6N 21.666,10.414 r270 top
X1 "32MHz" BT-XTAL_2016 119.425,43.713 r180 top
X2 "32.768kHz" XTAL_3215 108.671,38.525 r0 top
X3 "32MHz" BT-XTAL_2016 42.7,37.25 r270 top

## Footprints (in the part's own frame and the unit in brackets; to place one, negate y for a bottom-side part, rotate by r counter-clockwise, add the part's x,y. Pads: shape width x height; smd on the part's side, far side on the other; paste and mask are expansions set on the pad)
AQFN40P700X700X85_HS-99N [mm] "AQFN, 98-Leads, Body 7.00x7.00mm, Pitch 0.40mm, Thermal Pad 5.4x5.0mm, IPC Medium Density"
  rect 5.4x5 smd paste-5 mask+0.05: 104(0.2,0)
  round 0.4 smd paste+0.012 mask+0.05: A1(-3.2,3.2) A31(3.2,3.2) AL1(-3.2,-3.2) AL31(3.2,-3.2)
  round 0.225 smd paste+0.012 mask+0.05: A5(-2.2,3.2) A13(-0.6,3.2) A15(-0.2,3.2) A17(0.2,3.2) A19(0.6,3.2) A21(1,3.2) A23(1.4,3.2) A25(1.8,3.2) A27(2.2,3.2) AA1(-3.2,-1) AA31(3.2,-1) AB2(-2.8,-1.2) AC1(-3.2,-1.4) AC31(3.2,-1.4) AD2(-2.8,-1.6) AE1(-3.2,-1.8) AE31(3.2,-1.8) AF2(-2.8,-2) AG1(-3.2,-2.2) AG31(3.2,-2.2) AH2(-2.8,-2.4) AJ1(-3.2,-2.6) AJ31(3.2,-2.6) AK2(-2.8,-2.8) AK4(-2.4,-2.8) AK6(-2,-2.8) AK8(-1.6,-2.8) AK10(-1.2,-2.8) AK12(-0.8,-2.8) AK14(-0.4,-2.8) AK16(0,-2.8) AK18(0.4,-2.8) AK20(0.8,-2.8) AK22(1.2,-2.8) AK24(1.6,-2.8) AK26(2,-2.8) AK28(2.4,-2.8) AK30(2.8,-2.8) AL3(-2.6,-3.2) AL5(-2.2,-3.2) AL7(-1.8,-3.2) AL9(-1.4,-3.2) AL11(-1,-3.2) AL13(-0.6,-3.2) AL15(-0.2,-3.2) AL17(0.2,-3.2) AL19(0.6,-3.2) AL21(1,-3.2) AL23(1.4,-3.2) AL25(1.8,-3.2) AL27(2.2,-3.2) AL29(2.6,-3.2) B2(-2.8,2.8) B4(-2.4,2.8) B6(-2,2.8) B8(-1.6,2.8) B10(-1.2,2.8) B12(-0.8,2.8) B14(-0.4,2.8) B16(0,2.8) B18(0.4,2.8) B20(0.8,2.8) B22(1.2,2.8) B24(1.6,2.8) B26(2,2.8) B28(2.4,2.8) B30(2.8,2.8) C1(-3.2,2.6) C31(3.2,2.6) D2(-2.8,2.4) E1(-3.2,2.2) E31(3.2,2.2) F2(-2.8,2) G1(-3.2,1.8) G31(3.2,1.8) H2(-2.8,1.6) J1(-3.2,1.4) J31(3.2,1.4) K2(-2.8,1.2) L1(-3.2,1) L31(3.2,1) M2(-2.8,0.8) N1(-3.2,0.6) N31(3.2,0.6) P2(-2.8,0.4) R1(-3.2,0.2) R31(3.2,0.2) T2(-2.8,0) U1(-3.2,-0.2) U31(3.2,-0.2) V2(-2.8,-0.4) W1(-3.2,-0.6) W31(3.2,-0.6) Y2(-2.8,-0.8)
  rrect15% 1.1x1 on Top Paste: ""(-1.75,-1.8) ""(-1.75,-0.6) ""(-1.75,0.6) ""(-1.75,1.8) ""(-0.45,-1.8) ""(-0.45,-0.6) ""(-0.45,0.6) ""(-0.45,1.8) ""(0.85,-1.8) ""(0.85,-0.6) ""(0.85,0.6) ""(0.85,1.8) ""(2.15,-1.8) ""(2.15,-0.6) ""(2.15,0.6) ""(2.15,1.8)
  silkscreen extent -4.22,-3.6 3.6,3.6, body extent -3.5,-3.5 3.5,3.5, height 0.85
AQFN50P700X700X85_HS-74N [mm] "AQFN, 73-Leads, Body 7.00x7.00mm, Pitch 0.50mm, Thermal Pad 4.95x4.95mm, IPC Medium Density"
  rect 4.85x4.85 smd mask+0.05: 74(0,0)
  round 0.275 smd paste+0.012 mask+0.05: A8(-1.25,3.25) A10(-0.75,3.25) A12(-0.25,3.25) A14(0.25,3.25) A16(0.75,3.25) A18(1.25,3.25) A20(1.75,3.25) A22(2.25,3.25) A23(2.75,3.25) AA24(3.25,-2.25) AB2(-2.75,-2.5) AC5(-2,-2.75) AC9(-1,-2.75) AC11(-0.5,-2.75) AC13(0,-2.75) AC15(0.5,-2.75) AC17(1,-2.75) AC19(1.5,-2.75) AC21(2,-2.75) AC24(3.25,-2.75) AD2(-2.75,-3.25) AD4(-2.25,-3.25) AD6(-1.75,-3.25) AD8(-1.25,-3.25) AD10(-0.75,-3.25) AD12(-0.25,-3.25) AD14(0.25,-3.25) AD16(0.75,-3.25) AD18(1.25,-3.25) AD20(1.75,-3.25) AD22(2.25,-3.25) AD23(2.75,-3.25) B1(-3.25,2.75) B3(-2.5,2.75) B5(-2,2.75) B7(-1.5,2.75) B9(-1,2.75) B11(-0.5,2.75) B13(0,2.75) B15(0.5,2.75) B17(1,2.75) B19(1.5,2.75) B24(3.25,2.75) C1(-3.25,2.25) D2(-2.75,2) D23(2.75,2) E24(3.25,1.75) F2(-2.75,1.5) F23(2.75,1.5) G1(-3.25,1.25) H2(-2.75,1) H23(2.75,1) J1(-3.25,0.75) J24(3.25,0.75) K2(-2.75,0.5) L1(-3.25,0.25) L24(3.25,0.25) M2(-2.75,0) N1(-3.25,-0.25) N24(3.25,-0.25) P2(-2.75,-0.5) P23(2.75,-0.5) R1(-3.25,-0.75) R24(3.25,-0.75) T2(-2.75,-1) T23(2.75,-1) U1(-3.25,-1.25) U24(3.25,-1.25) V23(2.75,-1.5) W1(-3.25,-1.75) W24(3.25,-1.75) Y2(-2.75,-2) Y23(2.75,-2)
  silkscreen extent -4.56,-3.6 3.6,3.6, body extent -3.5,-3.5 3.5,3.5, height 0.87
BGA4C40P2X2_76X76X62 [mm] "BGA, 4-Leads, Body 0.8x0.8mm,  Pitch 0.40mm"
  round 0.235 smd mask+0.04: A1(-0.2,0.2) A2(0.2,0.2) B1(-0.2,-0.2) B2(0.2,-0.2)
  silkscreen extent -0.74,-0.45 0.45,0.74, body extent -0.39,-0.39 0.4,0.4, height 0.55
BT-XTAL_2016 [mm] "Crystal 2.0 x 1.6 mm"
  rect 0.95x0.85 smd: 1(-0.725,-0.575) 2(0.725,-0.575) 3(0.725,0.575) 4(-0.725,0.575)
  silkscreen extent -1.08,-0.88 1.08,0.88, body extent -1.05,-0.85 1.05,0.85, height 0.56
CAPC0603X03L_C [mm] "Chip Capacitor, 2-Leads, Body 0.6x0.3mm, IPC High Density"
  rect 0.27x0.3 smd mask+0.05: 1(-0.285,0) 2(0.285,0)
  silkscreen extent -0.49,-0.22 0.49,0.22, body extent -0.3,-0.15 0.3,0.15, height 0.3
CAPC0603X03L_C_NC [mm] "Chip Capacitor, 2-Leads, Body 0.6x0.3mm, IPC High Density"
  rect 0.27x0.3 smd mask+0.05: 1(-0.285,0) 2(0.285,0)
  silkscreen extent -0.49,-0.22 0.49,0.22
CAPC1005X04L [mm] "Chip Capacitor, 2-Leads, Body 1.0x0.5mm, IPC High Density"
  rect 0.6x0.5 smd: 1(-0.5,0) 2(0.5,0)
  silkscreen extent -0.9,-0.35 0.9,0.35, body extent -0.5,-0.25 0.5,0.25, height 0.5
CAPC1005X04L_NC [mm] "Chip Capacitor, 2-Leads, Body 1.0x0.5mm, IPC High Density"
  rect 0.6x0.5 smd: 1(-0.5,0) 2(0.5,0)
  silkscreen extent -0.9,-0.35 0.9,0.35
CAPC1608X06L [mm] "Chip Capacitor, 2-Leads, Body 1.6x0.8mm, IPC High Density"
  rect 0.75x0.8 smd: 1(-0.675,0) 2(0.675,0)
  silkscreen extent -1.17,-0.5 1.17,0.5, body extent -0.8,-0.4 0.8,0.4, height 0.8
CAPC1608X06L_NC [mm] "Chip Capacitor, 2-Leads, Body 1.6x0.8mm, IPC High Density"
  rect 0.75x0.8 smd: 1(-0.675,0) 2(0.675,0)
  silkscreen extent -1.17,-0.5 1.17,0.5
CAPC2012X11L [mm] "Chip Capacitor, 2-Leads, Body 2.0x1.3mm, IPC High Density"
  rect 1.1x1.4 smd: 1(-0.75,0) 2(0.75,0)
  silkscreen extent -1.43,-0.8 1.42,0.8, body extent -1,-0.62 1,0.63, height 1.25
CAS-220TA [mm] "SLIDE SWITCH DPDT J HOOK"
  rect 1x1.6 smd: 1(-1.75,-1.85) 2(0,-1.85) 3(1.75,-1.85) 4(-1.75,1.85) 5(0,1.85) 6(1.75,1.85)
  silkscreen extent -2.8,-2.6 2.7,2, body extent -2.7,-2.15 2.7,2.16, height 2.51
CJS-120xA [mm] "Slide Switches - SPDT, SMD, ON-ON"
  rect 1x1.6 smd: 1(1.75,-1.15) 2(0,1.15) 3(-1.75,-1.15)
  silkscreen extent -3,-1.25 3,1.25, body extent -3,-1.4 3,1.45, height 2.5
COAXIAL-SWF [mm]
  rect 0.5x0.58 smd: 1(0,1.16) 3(0,-1.16)
  rect 0.75x0.8 smd: 2(-1.025,-0.95) 2(-1.025,0.95) 2(1.025,-0.95) 2(1.025,0.95)
  Top Layer pour cut-out: -0.65,0.55 0.65,0.55 0.65,1.35 -0.65,1.35
  Top Layer pour cut-out: 0.65,-0.55 -0.65,-0.55 -0.65,-1.35 0.65,-1.35
  silkscreen extent -1.25,-1.25 1.25,1.25, body extent -1.26,-1.3 1.26,1.3, height 1.55
DFN65P100X40-3L [mm] "DFN, 3-Leads, Body 0.60x1.00mm, Pitch 0.65mm, IPC High Density"
  rect 0.4x0.25 smd mask+0.05: 1(-0.35,0.225) 2(-0.35,-0.225)
  rect 0.4x0.7 smd mask+0.065: 3(0.35,0)
  silkscreen extent -0.57,0.57 -0.48,0.67, body extent -0.53,-0.33 0.53,0.33, height 0.4
DFN65P200X200X80_HS-6N [mm] "DFN, 6-Leads, Body 2.00x2.00mm, Pitch 0.65mm, IPC Medium Density"
  rect 0.45x0.42 smd mask+0.055: 1(-0.905,0.65) 2(-0.905,0) 3(-0.905,-0.65) 4(0.905,-0.65) 5(0.905,0) 6(0.905,0.65)
  rect 0.92x0.71 smd mask+0.055: 3(0,-0.475) 6(0,0.475)
  silkscreen extent -1.47,-1.06 1.06,1.27, body extent -1.05,-1.05 1.05,1.05, height 0.65
Fiducial [mm] "Fiducial Mark"
  round 1 smd paste-2539.97 mask+0.5: 0(0,0)
  round 1 smd far side paste-2539.97 mask+0.5: 0(0,0)
  Top Layer keep-out circle w0.01: c0,0 r1
  Bottom Layer keep-out circle w0.01: c0,0 r1
FPC_05P-0.5mm-RA-SMD [mm] "FPC, 5-Leads, Pitch 0,5mm"
  rect 0.6x2.6 smd: 0(-0.9,-2.3) 0(2.9,-2.3)
  rect 0.3x0.8 smd mask+0.05: 1(0,0) 2(0.5,0) 3(1,0) 4(1.5,0) 5(2,0)
  silkscreen extent -1.38,-3.93 3.38,0.08, body extent -1.3,-3.85 3.3,0.2, height 1.2
HDR_2x3-SMD [mil] "Board-Board Conn, Header, 6-way, 2-row"
  rect 40x113 smd: 1(-100,-100) 2(-100,100) 3(0,-100) 4(0,100) 5(100,-100) 6(100,100)
  silkscreen extent -155,-135 150,100, body extent -150,-148 150,148, height 382
HDR_2x5-SMD-1.27mm-K [mm] "SMT MICRO HEADER, (1,27) .050\" Keying Shroud"
  rect 0.76x2.4 smd: 1(-2.54,-1.95) 2(-2.54,1.95) 3(-1.27,-1.95) 4(-1.27,1.95) 5(0,-1.95) 6(0,1.95) 7(1.27,-1.95) 8(1.27,1.95) 9(2.54,-1.95) 10(2.54,1.95)
  silkscreen extent -3.56,-2.38 3.25,1.75, body extent -3.14,-2.92 3.14,2.92, height 6.11
HDR_2x6-NC [mm] "Pin Header, 2.54mm through hole"
  rect 1.5x1.5 hole 0.9: 1(-6.35,-1.27)
  round 1.5 hole 0.9: 2(-6.35,1.27) 3(-3.81,-1.27) 4(-3.81,1.27) 5(-1.27,-1.27) 6(-1.27,1.27) 7(1.27,-1.27) 8(1.27,1.27) 9(3.81,-1.27) 10(3.81,1.27) 11(6.35,-1.27) 12(6.35,1.27)
  silkscreen extent -7.62,-2.54 7.62,2.54
HDR_2x8-NC [mm] "Pin Header, 2.54mm through hole"
  rect 1.5x1.5 hole 0.9: 1(-8.89,-1.27)
  round 1.5 hole 0.9: 2(-8.89,1.27) 3(-6.35,-1.27) 4(-6.35,1.27) 5(-3.81,-1.27) 6(-3.81,1.27) 7(-1.27,-1.27) 8(-1.27,1.27) 9(1.27,-1.27) 10(1.27,1.27) 11(3.81,-1.27) 12(3.81,1.27) 13(6.35,-1.27) 14(6.35,1.27) 15(8.89,-1.27) 16(8.89,1.27)
  silkscreen extent -10.16,-2.54 10.16,2.54
HDR_2x10-NC [mm] "Pin Header, 2.54mm through hole"
  rect 1.5x1.5 hole 0.9: 1(-11.43,-1.27)
  round 1.5 hole 0.9: 2(-11.43,1.27) 3(-8.89,-1.27) 4(-8.89,1.27) 5(-6.35,-1.27) 6(-6.35,1.27) 7(-3.81,-1.27) 8(-3.81,1.27) 9(-1.27,-1.27) 10(-1.27,1.27) 11(1.27,-1.27) 12(1.27,1.27) 13(3.81,-1.27) 14(3.81,1.27) 15(6.35,-1.27) 16(6.35,1.27) 17(8.89,-1.27) 18(8.89,1.27) 19(11.43,-1.27) 20(11.43,1.27)
  silkscreen extent -12.7,-2.54 12.7,2.54
HDR_2x10-SMD-1.27mm-NC [mm] "SMT MICRO HEADER, (1,27) .050\""
  rect 0.76x2.4 smd paste-2: 1(-5.715,-1.95) 2(-5.715,1.95) 3(-4.445,-1.95) 4(-4.445,1.95) 5(-3.175,-1.95) 6(-3.175,1.95) 7(-1.905,-1.95) 8(-1.905,1.95) 9(-0.635,-1.95) 10(-0.635,1.95) 11(0.635,-1.95) 12(0.635,1.95) 13(1.905,-1.95) 14(1.905,1.95) 15(3.175,-1.95) 16(3.175,1.95) 17(4.445,-1.95) 18(4.445,1.95) 19(5.715,-1.95) 20(5.715,1.95)
  silkscreen extent -6.73,-2.38 6.43,1.75
INDC1005X04L [mm] "Chip Inductor, 2-Leads, Body 1.0x0.5mm, IPC High Density"
  rect 0.65x0.5 smd: 1(-0.475,0) 2(0.475,0)
  silkscreen extent -0.9,-0.35 0.9,0.35, body extent -0.5,-0.25 0.5,0.25, height 0.5
INDC1608X06L [mm] "Chip Inductor, 2-Leads, Body 1.6x0.8mm, IPC High Density"
  rect 0.75x0.8 smd: 1(-0.675,0) 2(0.675,0)
  silkscreen extent -1.17,-0.5 1.17,0.5, body extent -0.8,-0.4 0.8,0.4, height 0.8
L-KLS5-CR2032-23-B1 [mm] "SMT,CR2032 Coin Battery Holder"
  rect 3.2x4.2 smd: 1(-14.65,0) 2(14.65,0)
  silkscreen extent -16,-8 14.42,8, body extent -15.7,-8 15.85,8, height 5.17
LED_0603_G [mil] "SMD Super Bright LED, GREEN"
  rect 30x32 smd: 1(-27.5,0) 2(27.5,0)
  silkscreen extent -58,-20 48,20, body extent -32,-16 32,16, height 24
LIST_1x2-NC [mm] "Pin List, 2.54mm through hole"
  rect 1.5x1.5 hole 0.9: 1(-1.27,0)
  round 1.5 hole 0.9: 2(1.27,0)
  silkscreen extent -2.54,-1.27 2.54,1.27
LIST_1x3-NC [mm] "Pin List, 2.54mm through hole"
  rect 1.5x1.5 hole 0.9: 1(-2.54,0)
  round 1.5 hole 0.9: 2(0,0) 3(2.54,0)
  silkscreen extent -3.81,-1.27 3.81,1.27
LIST_1x6_SMD-NC [mm] "Pin List, 2.54mm, SMD"
  rect 1.02x2.19 smd: 1(0,-1.465) 1(0,1.465) 2(2.54,-1.465) 2(2.54,1.465) 3(5.08,-1.465) 3(5.08,1.465) 4(7.62,-1.465) 4(7.62,1.465) 5(10.16,-1.465) 5(10.16,1.465) 6(12.7,-1.465) 6(12.7,1.465)
  silkscreen extent -1.27,-1.27 13.97,1.27
LIST_1x8_SMD-NC [mm] "Pin List, 2.54mm, SMD"
  rect 1.02x2.19 smd: 1(0,-1.465) 1(0,1.465) 2(2.54,-1.465) 2(2.54,1.465) 3(5.08,-1.465) 3(5.08,1.465) 4(7.62,-1.465) 4(7.62,1.465) 5(10.16,-1.465) 5(10.16,1.465) 6(12.7,-1.465) 6(12.7,1.465) 7(15.24,-1.465) 7(15.24,1.465) 8(17.78,-1.465) 8(17.78,1.465)
  silkscreen extent -1.27,-1.27 19.05,1.27
LIST_1x10_SMD-NC [mm] "Pin List, 2.54mm, SMD"
  rect 1.02x2.19 smd: 1(0,-1.465) 1(0,1.465) 2(2.54,-1.465) 2(2.54,1.465) 3(5.08,-1.465) 3(5.08,1.465) 4(7.62,-1.465) 4(7.62,1.465) 5(10.16,-1.465) 5(10.16,1.465) 6(12.7,-1.465) 6(12.7,1.465) 7(15.24,-1.465) 7(15.24,1.465) 8(17.78,-1.465) 8(17.78,1.465) 9(20.32,-1.465) 9(20.32,1.465) 10(22.86,-1.465) 10(22.86,1.465)
  silkscreen extent -1.27,-1.27 24.13,1.27
LIST_1x13_SMD [mm] "Pin List, 2.54mm, SMD"
  rect 1.02x2.19 smd: 1(0,-1.465) 1(0,1.465) 2(2.54,-1.465) 2(2.54,1.465) 3(5.08,-1.465) 3(5.08,1.465) 4(7.62,-1.465) 4(7.62,1.465) 5(10.16,-1.465) 5(10.16,1.465) 6(12.7,-1.465) 6(12.7,1.465) 7(15.24,-1.465) 7(15.24,1.465) 8(17.78,-1.465) 8(17.78,1.465) 9(20.32,-1.465) 9(20.32,1.465) 10(22.86,-1.465) 10(22.86,1.465) 11(25.4,-1.465) 11(25.4,1.465) 12(27.94,-1.465) 12(27.94,1.465) 13(30.48,-1.465) 13(30.48,1.465)
  silkscreen extent -1.27,-1.27 31.75,1.27, body extent -1.27,-2.5 31.75,2.5, height 9.82
LIST_1x13_SMD-NC [mm] "Pin List, 2.54mm, SMD"
  rect 1.02x2.19 smd: 1(0,-1.465) 1(0,1.465) 2(2.54,-1.465) 2(2.54,1.465) 3(5.08,-1.465) 3(5.08,1.465) 4(7.62,-1.465) 4(7.62,1.465) 5(10.16,-1.465) 5(10.16,1.465) 6(12.7,-1.465) 6(12.7,1.465) 7(15.24,-1.465) 7(15.24,1.465) 8(17.78,-1.465) 8(17.78,1.465) 9(20.32,-1.465) 9(20.32,1.465) 10(22.86,-1.465) 10(22.86,1.465) 11(25.4,-1.465) 11(25.4,1.465) 12(27.94,-1.465) 12(27.94,1.465) 13(30.48,-1.465) 13(30.48,1.465)
  silkscreen extent -1.27,-1.27 31.75,1.27
LIST_ANG_1x2-SMD-2.54MM [mm] "Pin List, 2.54mm, Surface Mount, Angled"
  round 1.7 hole 1.7 unplated: 0(0,-4.496)
  rect 1.02x4 smd: 1(-1.27,0.204) 2(1.27,0.204)
  silkscreen extent -2.54,-11.58 2.54,-2.22, body extent -2.56,-11.61 2.52,1.35, height 3.03
MKH-22D14-G2-B [mm] "Slide Switches - DPDT, SMD, ON-ON"
  rect 1.2x2 smd: 1(2.5,-2.75) 2(0,-2.75) 3(-2.5,-2.75) 4(2.5,2.75) 5(0,2.75) 6(-2.5,2.75)
  silkscreen extent -4.5,-3.75 4.5,1.75, body extent -4.25,-3.75 4.25,2.5, height 3.5
PMCPB5530X [mm] "QFN, 6-Leads, Body 2.00x2.00mm, Pitch 0.65mm, IPC Medium Density"
  rect 0.3x0.35 smd mask+0.05: 1(-0.875,0.65) 2(-0.875,0) 3(-0.875,-0.65) 4(0.875,-0.65) 5(0.875,0) 6(0.875,0.65)
  rect 1.05x0.72 smd mask+0.05: 3(0,-0.49) 6(0,0.49)
  silkscreen extent -1.47,-1.06 1.06,1.27, body extent -1.05,-1.05 1.05,1.05, height 0.65
RESC0603X03L_C [mm] "Chip Resistor, 2-Leads, Body 0.6x0.3mm, IPC High Density"
  rect 0.27x0.3 smd: 1(-0.285,0) 2(0.285,0)
  silkscreen extent -0.49,-0.22 0.49,0.22, body extent -0.3,-0.15 0.3,0.15, height 0.23
RESC0603X03L_C_NC [mm] "Chip Resistor, 2-Leads, Body 0.6x0.3mm, IPC High Density"
  rect 0.27x0.3 smd: 1(-0.285,0) 2(0.285,0)
  silkscreen extent -0.49,-0.22 0.49,0.22
RESC1005X04L [mm] "Chip Resistor, 2-Leads, Body 1.0x0.5mm, IPC High Density"
  rect 0.6x0.55 smd mask+0.05: 1(-0.5,0) 2(0.5,0)
  silkscreen extent -0.87,-0.38 0.88,0.38, body extent -0.5,-0.25 0.5,0.25, height 0.3
RESC1005X04L_NC [mm] "Chip Resistor, 2-Leads, Body 1.0x0.5mm, IPC High Density"
  rect 0.6x0.55 smd mask+0.05: 1(-0.5,0) 2(0.5,0)
  silkscreen extent -0.87,-0.38 0.88,0.38
SM02B-SRSS-TB [mm] "JST, SH connector, side entry SMD, 1mm pitch"
  rect 1.2x1.8 smd: 0(-2.1,-3.875) 0(2.1,-3.875)
  rect 0.6x1.55 smd: 1(-0.5,0) 2(0.5,0)
  silkscreen extent -2.07,-4.67 2.07,-0.3, body extent -2,-4.55 2,0.4, height 2.95
SOCKET_1x6_SMD [mm] "Socket, 2.54mm, SMD"
  rect 1.02x2.19 smd: 1(0,-1.465) 1(0,1.465) 2(2.54,-1.465) 2(2.54,1.465) 3(5.08,-1.465) 3(5.08,1.465) 4(7.62,-1.465) 4(7.62,1.465) 5(10.16,-1.465) 5(10.16,1.465) 6(12.7,1.465) 6(12.7,-1.465)
  silkscreen extent -1.9,-1.27 13.97,1.65, body extent -1.27,-2.29 13.97,2.29, height 7.47
SOCKET_1x8_SMD [mm] "Socket, 2.54mm, SMD"
  rect 1.02x2.19 smd: 1(0,-1.465) 1(0,1.465) 2(2.54,-1.465) 2(2.54,1.465) 3(5.08,-1.465) 3(5.08,1.465) 4(7.62,-1.465) 4(7.62,1.465) 5(10.16,-1.465) 5(10.16,1.465) 6(12.7,1.465) 6(12.7,-1.465) 7(15.24,-1.465) 7(15.24,1.465) 8(17.78,-1.465) 8(17.78,1.465)
  silkscreen extent -1.9,-1.27 19.05,1.65, body extent -1.27,-2.29 19.05,2.29, height 7.47
SOCKET_1x10_SMD [mm] "Socket, 2.54mm, SMD"
  rect 1.02x2.19 smd: 1(0,1.465) 1(0,-1.465) 2(2.54,-1.465) 2(2.54,1.465) 3(5.08,-1.465) 3(5.08,1.465) 4(7.62,-1.465) 4(7.62,1.465) 5(10.16,-1.465) 5(10.16,1.465) 6(12.7,-1.465) 6(12.7,1.465) 7(15.24,-1.465) 7(15.24,1.465) 8(17.78,-1.465) 8(17.78,1.465) 9(20.32,-1.465) 9(20.32,1.465) 10(22.86,-1.465) 10(22.86,1.465)
  silkscreen extent -1.91,-1.27 24.13,1.65, body extent -1.27,-2.29 24.13,2.29, height 7.47
SOCKET_2x3_SMD-2.54mm-NC [mm] "Socket, 2.54mm, SMD"
  rect 1.02x2.22 smd: 1(2.54,-2.825) 2(2.54,2.825) 3(0,-2.825) 4(0,2.825) 5(-2.54,-2.825) 6(-2.54,2.825)
  silkscreen extent -3.81,-3.3 3.81,2.54
SOCKET_2x9_SMD-2.54mm-Mirrored [mil] "CONN HEADER VERT DUAL 18POS SMD - FEMALE HEADER, PCB, 0.1\", 10+10WAY"
  rect 50x150 smd: 1(-400,-87.5) 2(-400,87.5) 3(-300,-87.5) 4(-300,87.5) 5(-200,-87.5) 6(-200,87.5) 7(-100,-87.5) 8(-100,87.5) 9(0,-87.5) 10(0,87.5) 11(100,-87.5) 12(100,87.5) 13(200,-87.5) 14(200,87.5) 15(300,-87.5) 16(300,87.5) 17(400,-87.5) 18(400,87.5)
  silkscreen extent -450,-130 450,100, body extent -450,-138 450,139, height 290
SODFL100X40-2N [mm] "SODFL, 2-Leads, Body 0.60x1.00mm, IPC Medium Density"
  rect 0.36x0.25 smd: 1(-0.42,0) 2(0.42,0)
  silkscreen extent -0.7,-0.35 0.5,0.5, body extent -0.5,-0.33 0.5,0.33, height 0.4
SODFL500X108-2N [mm] "SODFL, 2-Leads, Body 2.70x5.00mm, IPC Medium Density"
  rect 1.3x1.75 smd: 1(-2.05,0) 2(2.05,0)
  silkscreen extent -2.9,-1.4 2.15,1.43, body extent -2.5,-1.4 2.5,1.4, height 1.08
Solderbridge [mil]
  round 1 smd paste-99999: 1(-13.78,0) 2(13.78,0)
  Top Layer region: 7.49,-19.36 15.76,-15.74 21.55,-8.8 23.62,0 23.62,0 21.55,8.79 15.76,15.74 7.49,19.36 7.49,19.36 6.18,19.31 5.02,18.71 4.22,17.68 3.94,16.4 3.94,16.4 3.94,-16.4 4.22,-17.68 5.02,-18.71 6.18,-19.31 7.49,-19.36
  Top Layer region: -7.49,19.36 -15.76,15.74 -21.55,8.8 -23.62,0 -23.62,0 -21.55,-8.79 -15.76,-15.74 -7.49,-19.36 -7.49,-19.36 -6.18,-19.31 -5.02,-18.71 -4.22,-17.68 -3.94,-16.4 -3.94,-16.4 -3.94,16.4 -4.22,17.68 -5.02,18.71 -6.18,19.31 -7.49,19.36
Solderbridge_Shorted [mil]
  round 1 smd paste-99999: 1(-13.78,0) 2(13.78,0)
  Top Layer region: -4.92,3.94 -4.92,-3.94 4.92,-3.94 4.92,3.94
  Top Layer region: -7.49,19.36 -15.76,15.74 -21.55,8.8 -23.62,0 -23.62,0 -21.55,-8.79 -15.76,-15.74 -7.49,-19.36 -7.49,-19.36 -6.18,-19.31 -5.02,-18.71 -4.22,-17.68 -3.94,-16.4 -3.94,-16.4 -3.94,16.4 -4.22,17.68 -5.02,18.71 -6.18,19.31 -7.49,19.36
  Top Layer region: 7.49,-19.36 15.76,-15.74 21.55,-8.8 23.62,0 23.62,0 21.55,8.79 15.76,15.74 7.49,19.36 7.49,19.36 6.18,19.31 5.02,18.71 4.22,17.68 3.94,16.4 3.94,16.4 3.94,-16.4 4.22,-17.68 5.02,-18.71 6.18,-19.31 7.49,-19.36
SON127P600X80_HS-9N [mm] "SON, 8-Leads, Body 5.00x6.00mm, Pitch 1.27mm, Thermal Pad 4.00x3.40mm, IPC Medium Density"
  rect 1.15x0.45 smd: 1(-2.77,1.905) 2(-2.77,0.635) 3(-2.77,-0.635) 4(-2.77,-1.905) 5(2.77,-1.905) 6(2.77,-0.635) 7(2.77,0.635) 8(2.77,1.905)
  rect 3.4x4 smd paste-1.7: 9(0,0)
  silkscreen extent -3.98,-2.6 3.1,2.67, body extent -3.05,-2.55 3.05,2.55, height 0.8
SOT65P210X100-5N [mm] "SOT23, 5-Leads, Body 2,2x2,4mm (max), Pitch 0,65mm, IPC Medium Density"
  rect 0.9x0.35 smd: 1(-0.95,0.65) 2(-0.95,0) 3(-0.95,-0.65) 4(0.95,-0.65) 5(0.95,0.65)
  silkscreen extent -1.08,-1.1 0.1,1.5, body extent -1.1,-1 1.1,1, height 0.97
SOT65P210X100-6N [mm] "SOT23, 6-Leads, Body 2,2x2,4mm (max), Pitch 0,65mm, IPC Medium Density"
  rect 0.9x0.35 smd: 1(-0.95,0.65) 2(-0.95,0) 3(-0.95,-0.65) 4(0.95,-0.65) 5(0.95,0) 6(0.95,0.65)
  silkscreen extent -1.07,-1.1 0.1,1.5, body extent -1.05,-1 1.05,1, height 0.92
SOT89-150P409X160-3N [mm] "SOT89, 3-Leads, Body 4.50x2.45mm, Pitch 1.50mm, Lead Span 4.1mm, IPC Medium Density"
  rect 1.4x0.6 smd: 1(-1.8,1.5) 3(-1.8,-1.5)
  rect 1.7x0.6 smd: 2(-1.65,0)
  Top Layer region: -1.016,-0.3 -0.635,-0.3 -0.635,0.3 -1.016,0.3
  Top Layer region: -0.8,0.3 -0.15,0.95 1.85,0.95 2.5,0.3 2.5,-0.3 1.85,-0.95 -0.15,-0.95 -0.8,-0.3
  silkscreen extent -2.05,-2.3 1.32,2.47, body extent -2.2,-2.3 1.93,2.3, height 1.6
SOT190P230X110-4L [mm] "SOT143, 4-Leads, Body 3.0x2.5mm (max), Pitch 1.90mm, IPC High Density"
  rect 0.85x1 smd: 1(-1.025,0.75)
  rect 0.85x0.6 smd: 2(-1.025,-0.95) 3(1.025,-0.95) 4(1.025,0.95)
  silkscreen extent -1.15,-1.5 0.7,1.92, body extent -1.21,-1.46 1.21,1.46, height 1
Switch-PB-6.2x6.3mm-SMD [mm] "6.2×6.5mm TACT Switch, without ground connector"
  rect 2.75x1.4 smd: 1(-3.375,2) 1(3.375,2) 2(-3.375,-2) 2(3.375,-2)
  silkscreen extent -3,-3 3,3, body extent -3.6,-3.1 3.6,3.1, height 2.5
Switch-Slide-J-Lead-DP3T-13x3.5mm [mm] "Slide Switch - DP3T, SMD, ON-ON-ON"
  rect 1.2x1.6 smd: 1(-4,-1.4) 2(-2,-1.4) 3(2,-1.4) 4(4,-1.4) 5(-4,1.4) 6(-2,1.4) 7(2,1.4) 8(4,1.4)
  silkscreen extent -6,-1.75 6,1.75, body extent -6,-1.8 6,1.7, height 5.5
TC2050-IDC-NLFP [mil]
  round 39 hole 39 unplated: 0(-150,0) 0(150,-40) 0(150,40)
  round 31 smd paste-196.85: 1(-100,-25) 2(-50,-25) 3(0,-25) 4(50,-25) 5(100,-25) 6(100,25) 7(50,25) 8(0,25) 9(-50,25) 10(-100,25)
  Top Layer pour cut-out: -100,25 -100,-25 100,-25 100,25
TESTPAD-TH [mm]
  round 1.5 hole 1: 1(0,0)
  silkscreen extent -1,-1 1,1
TP_SMD_D1.0mm [mm] "Test point - pad 1.0mm"
  round 1 smd paste-5: 1(0,0)
  silkscreen extent -0.76,-0.76 0.76,0.76
TP_SMD_D1.5mm [mm] "Test point - pad 1.5mm"
  round 1.5 smd paste-5: 1(0,0)
  silkscreen extent -0.95,-0.95 0.95,0.95, body extent -0.75,-0.75 0.75,0.75, height 0.05
TSOP65P640X120-8N [mm] "TSOP, 8-Leads, Body 3.00x4.40mm, Pitch 0.65mm, IPC Medium Density"
  oval 1.4x0.4 smd: 1(-2.95,0.975) 2(-2.95,0.325) 3(-2.95,-0.325) 4(-2.95,-0.975) 5(2.95,-0.975) 6(2.95,-0.325) 7(2.95,0.325) 8(2.95,0.975)
  silkscreen extent -3.07,-1.55 1.85,1.87, body extent -3.2,-1.55 3.2,1.55, height 1.2
TY-NR3015 [mm] "Molded Inductor, 2-Leads, Body 3.00x3.00mm, IPC Medium Density"
  rect 0.8x2.7 smd: 1(-1.1,0) 2(1.1,0)
  silkscreen extent -2.05,-1.55 1.55,1.75, body extent -1.5,-1.5 1.5,1.5, height 1.35
USB-Micro-B-RA-SMD-PiP_Allen [mm] "Micro USB B SMT"
  rect 1.35x0.4 smd mask+0.075: 1(0,1.3) 2(0,0.65) 3(0,0) 4(0,-0.65) 5(0,-1.3)
  oval 2.15x1 hole 0.45 slot 1.5 at 0 deg paste-2539.97: 6(-2.675,-3.2) 6(-2.675,3.2)
  oval 2.4x1.4 on Top Paste: 6(-2.675,-3.2) 6(-2.675,3.2)
  rect 1.2x1.8 smd: 6(0.073,-3.25) 6(0.073,3.25)
  silkscreen extent -4.75,-3.75 0.25,3.75, body extent -5.43,-3.93 0.28,3.93, height 2.84
USP-6C [mm] "DFN, 6-Leads, Body 2.00x1.80mm, Pitch 0.50mm, Thermal Pad 1.00x1.40mm, IPC Medium Density"
  rect 0.45x0.35 smd paste-0.05 mask+0.075: 1(-0.975,0.55)
  rect 0.45x0.25 smd paste-0.05 mask+0.075: 2(-0.975,0) 3(-0.975,-0.5) 4(0.975,-0.5) 5(0.975,0) 6(0.975,0.5)
  rect 0.9x1.8 smd paste-2: 7(0,0)
  Top Layer region: -0.5,-0.8 0.5,-0.8 0.5,0.8 -0.5,0.8
  silkscreen extent -1.42,-1.07 0.97,1.12, body extent -0.93,-1.02 0.93,1.02, height 0.6
VLS3012HBX [mm] "4.7µH Shielded Wirewound Inductor 2.23A 201 mOhm Max Nonstandard"
  rect 1x3.4 smd: 1(-1.05,0) 2(1.05,0)
  silkscreen extent -0.37,-1.55 0.38,1.55, body extent -1.53,-1.51 1.53,1.51, height 1.2
XQFN40P180X260X50-16N [mm] "QFN, 16-Leads, Body 1.80x2.60mm, Pitch 0.40mm, IPC Medium Density"
  oval 0.65x0.22 smd paste-0.02 mask+0.04: 1(-0.825,0.6) 2(-0.825,0.2) 3(-0.825,-0.2) 4(-0.825,-0.6) 9(0.825,-0.6) 10(0.825,-0.2) 11(0.825,0.2) 12(0.825,0.6)
  oval 0.22x0.65 smd paste-0.02 mask+0.04: 5(-0.6,-1.225) 6(-0.2,-1.225) 7(0.2,-1.225) 8(0.6,-1.225) 13(0.6,1.225) 14(0.2,1.225) 15(-0.2,1.225) 16(-0.6,1.225)
  silkscreen extent -1.45,-1.4 1,1.4, body extent -0.91,-1.31 0.91,1.31, height 0.55
XTAL_3215 [mm] "XTAL SMD 3.2 x 1.5 mm"
  rect 1x1.8 smd: 1(-1.25,0) 2(1.25,0)
  silkscreen extent -0.6,-0.75 0.6,0.75, body extent -1.6,-0.75 1.6,0.75, height 0.81